# Altium PCB Main.PcbDoc (part 1 of 4)
Units mm, origin at the board's own origin, x right, y up, seen from the top; angles counter-clockwise.
Board outline 172.29 x 85.1 mm, 6 copper layers (Component Side, Ground Plane, Signal Layer 1, Signal Layer 2, Power Plane, Solder Side), stack 1.297 mm thick; 277 components, 256 nets, 1030 pads, 416 vias.
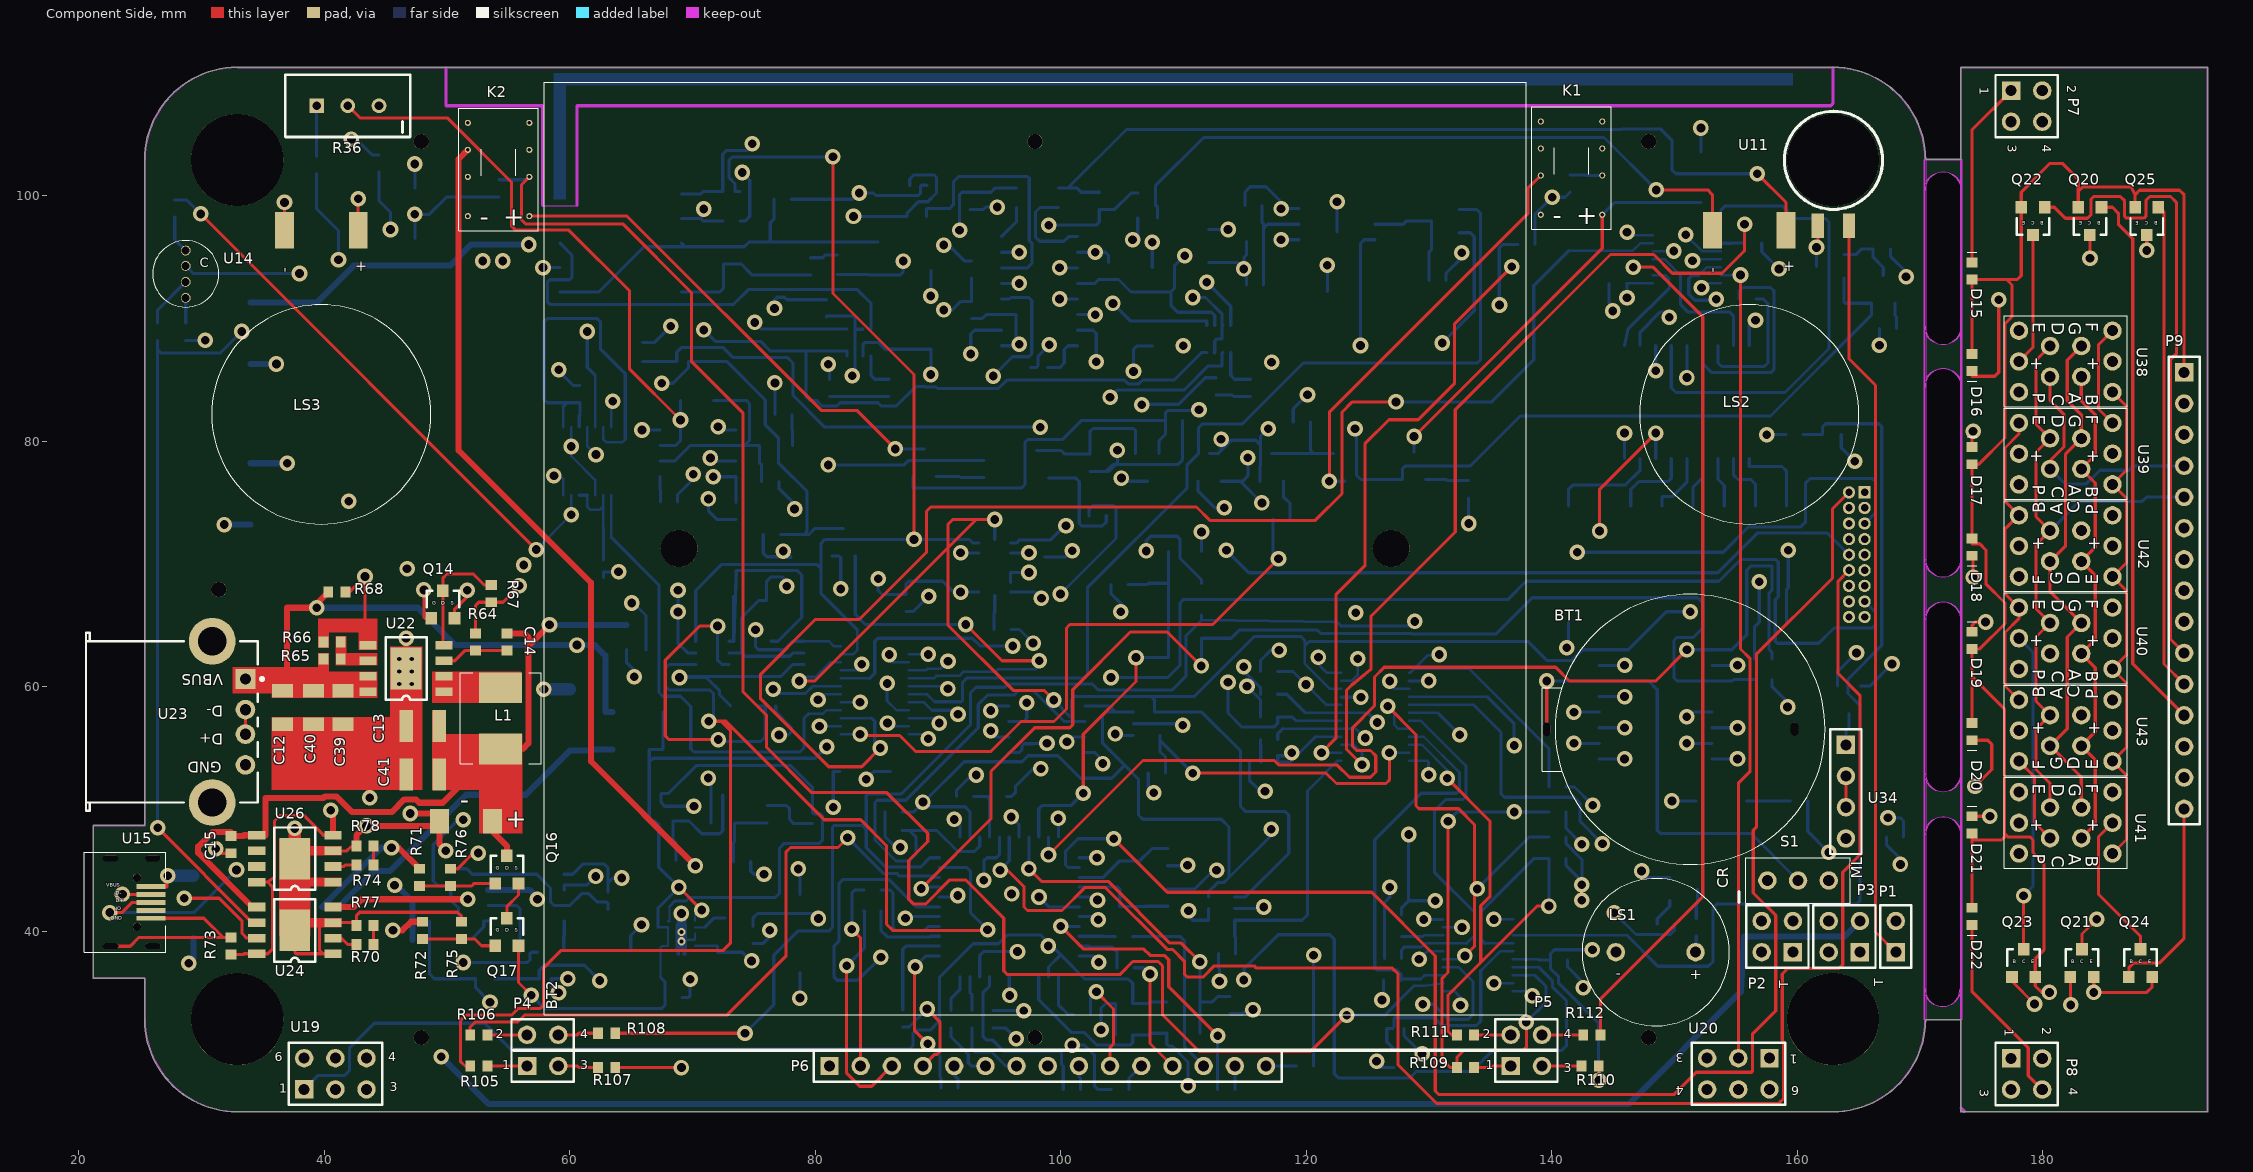
[diagram p0: Component Side view]
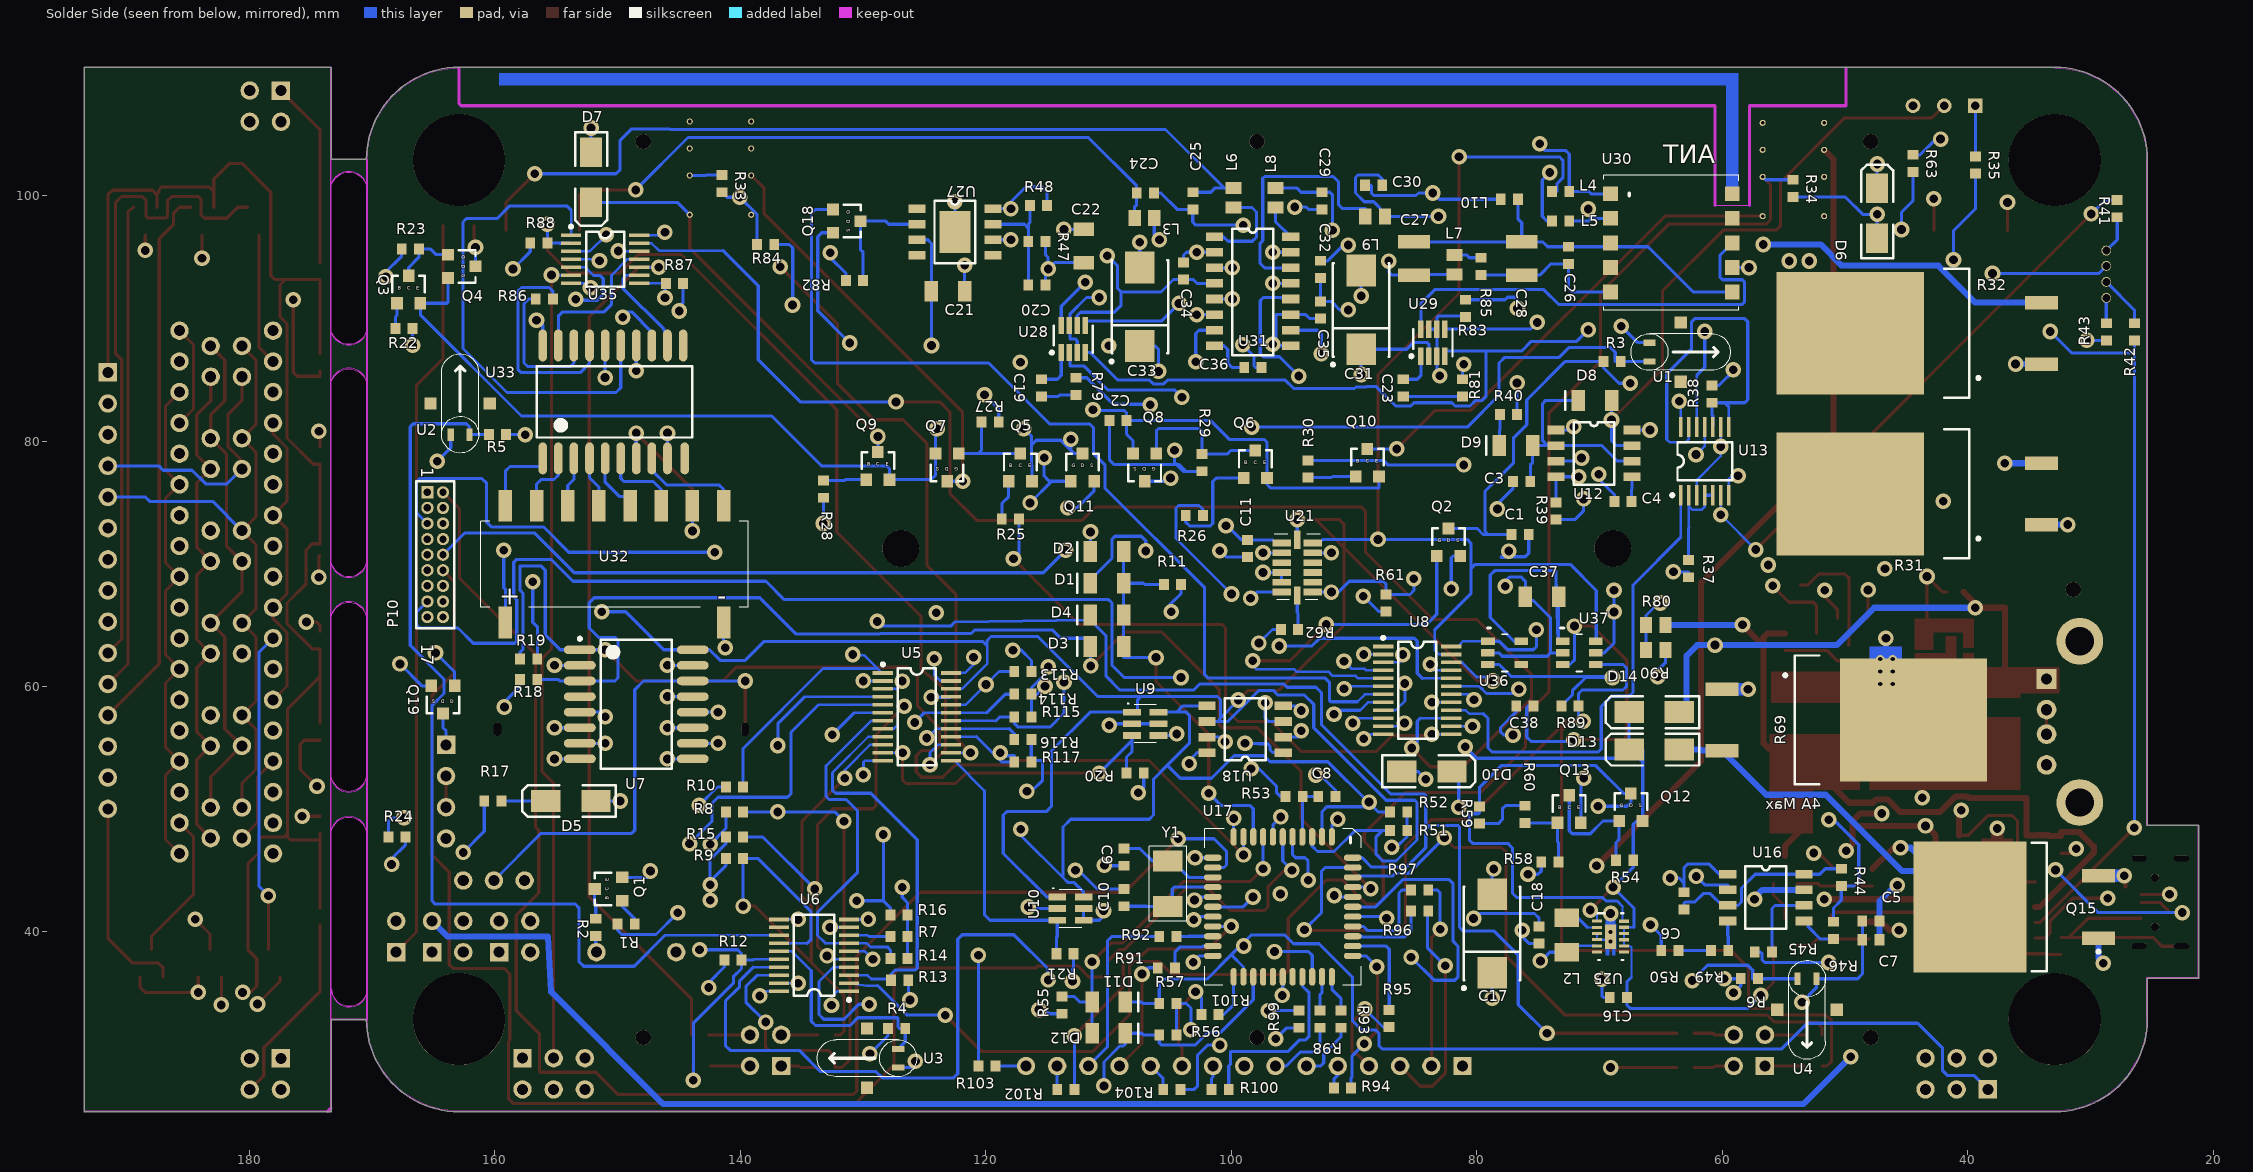
[diagram p1: Solder Side view, seen from below]
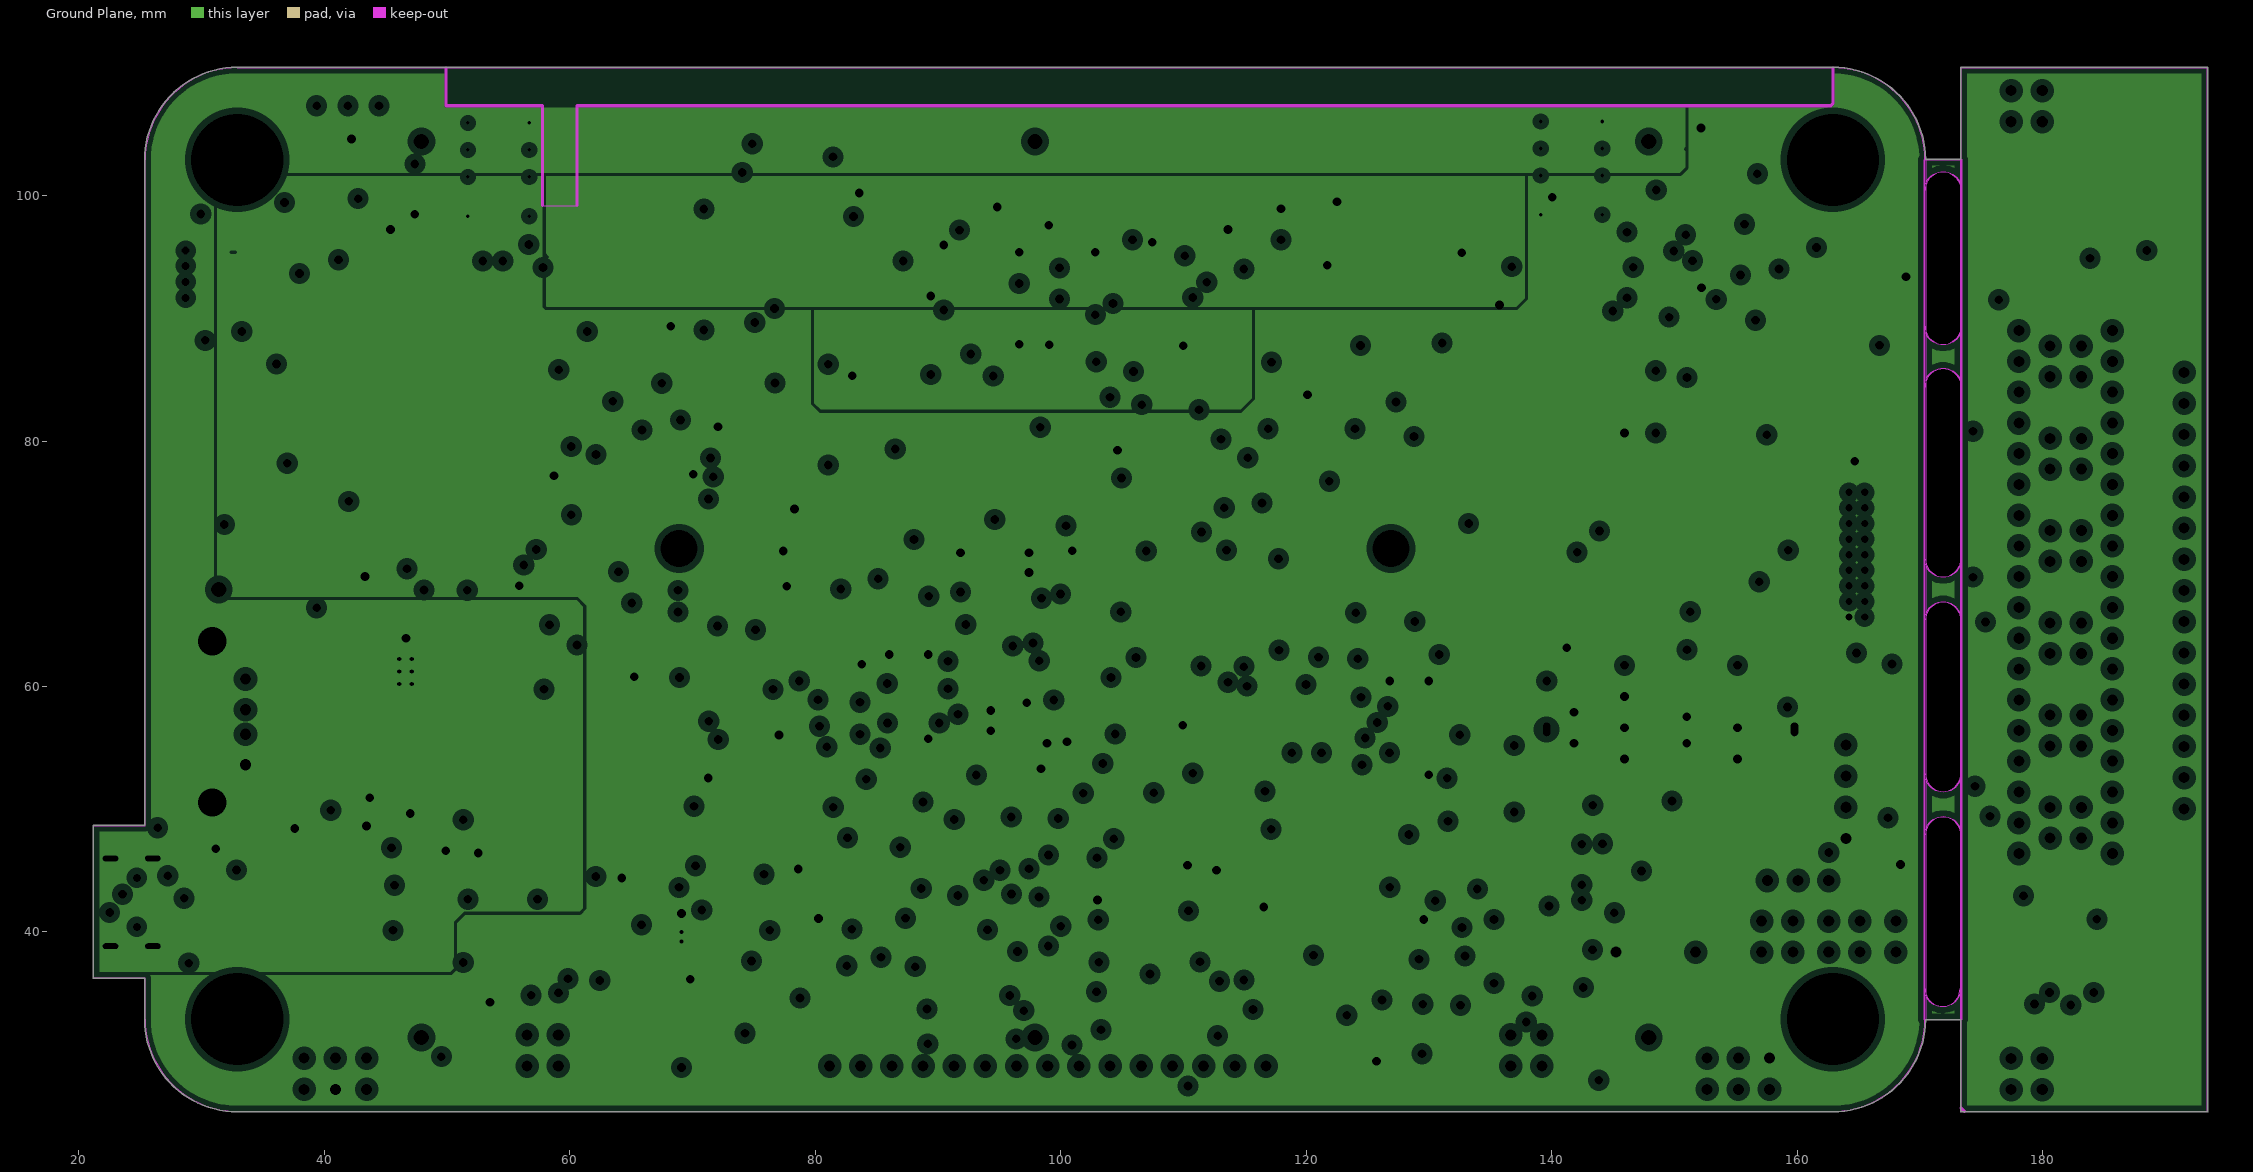
[diagram p2: Ground Plane, clearances drawn from the general rule]
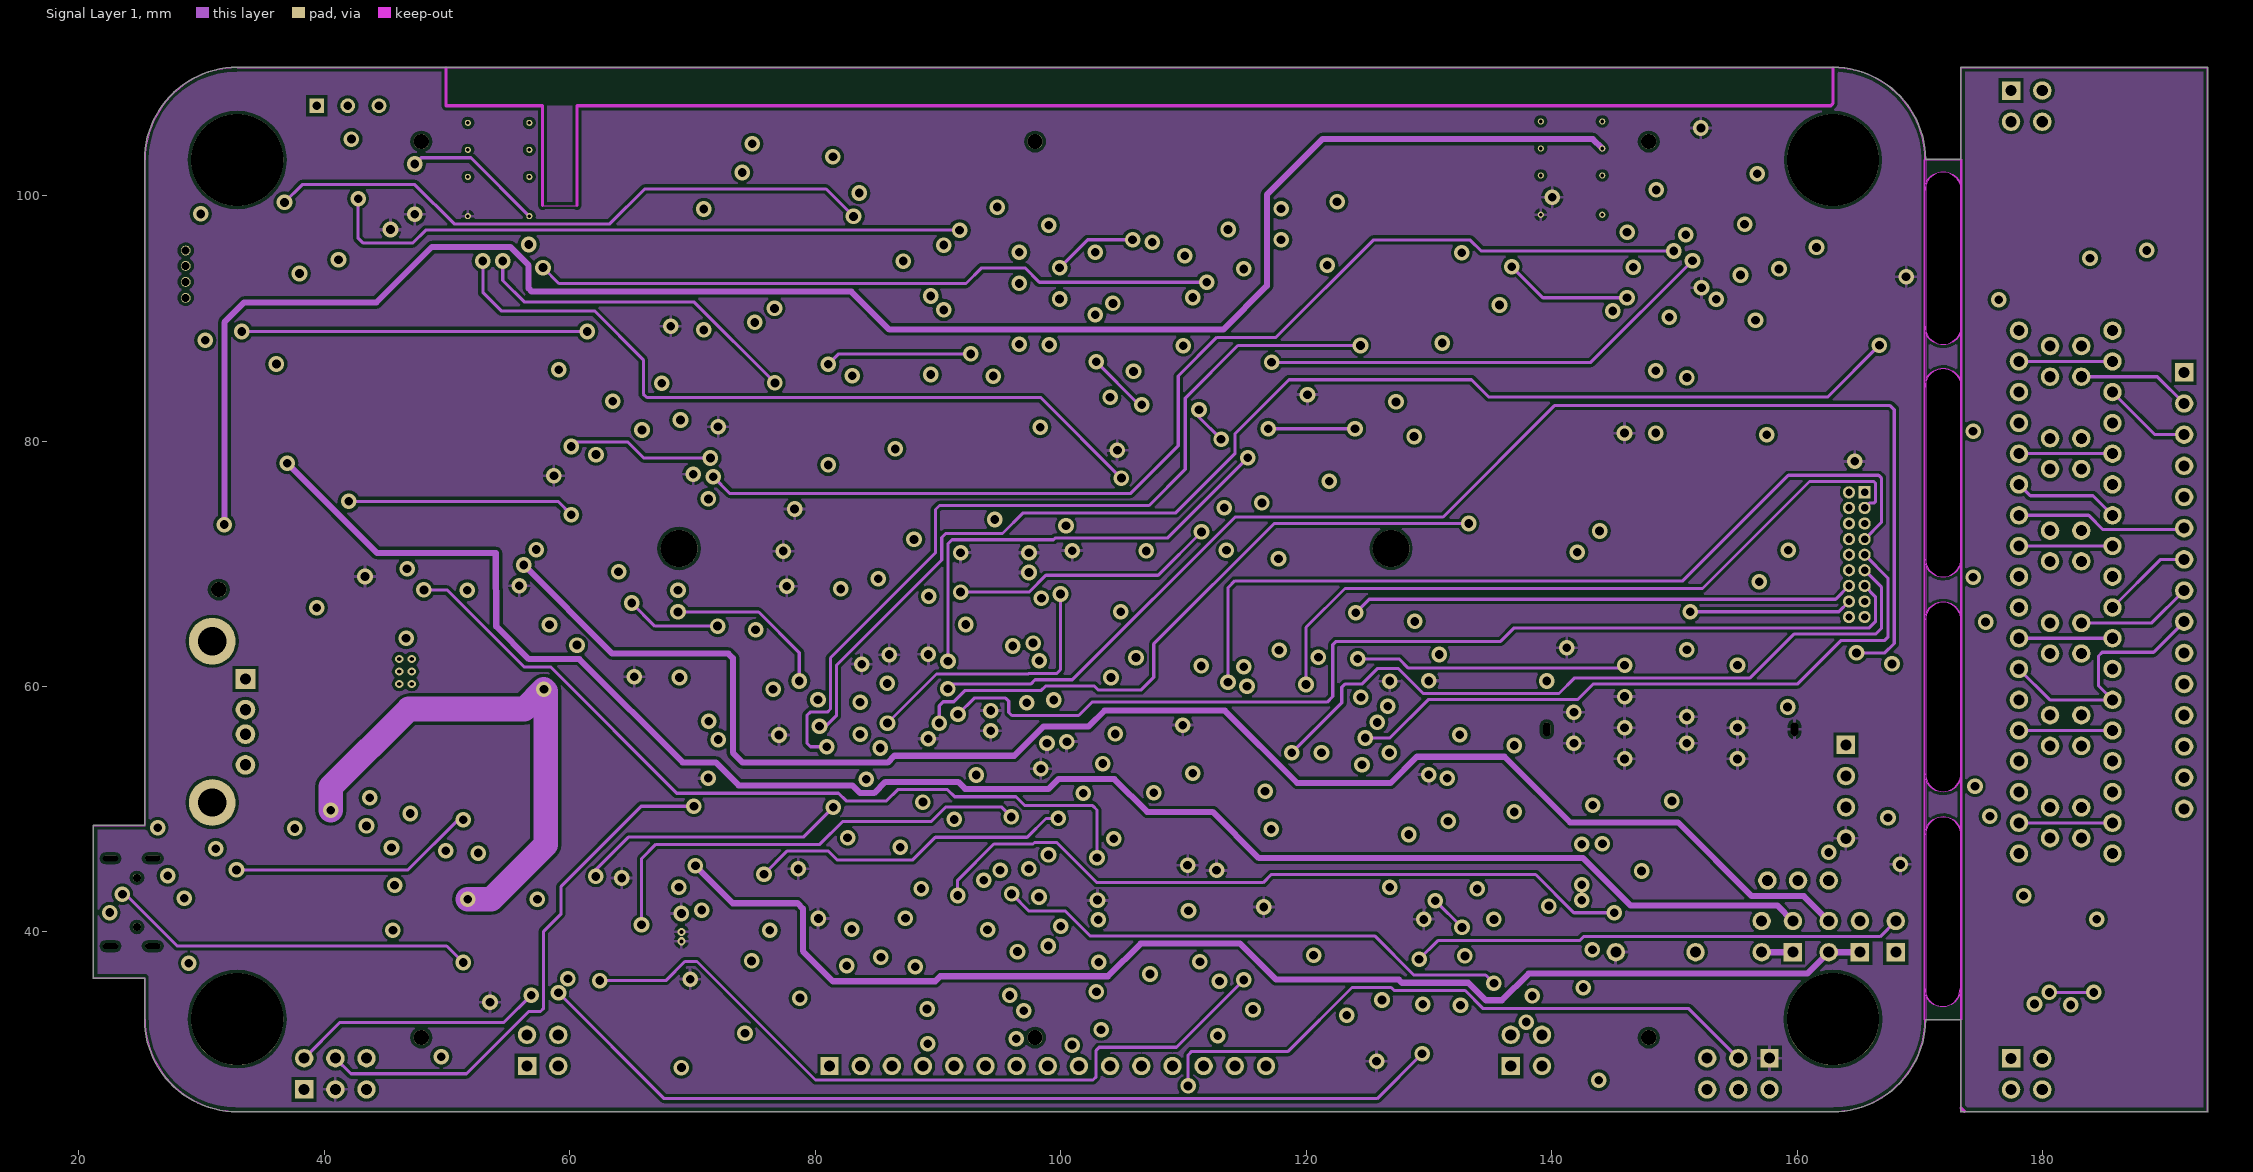
[diagram p3: Signal Layer 1]
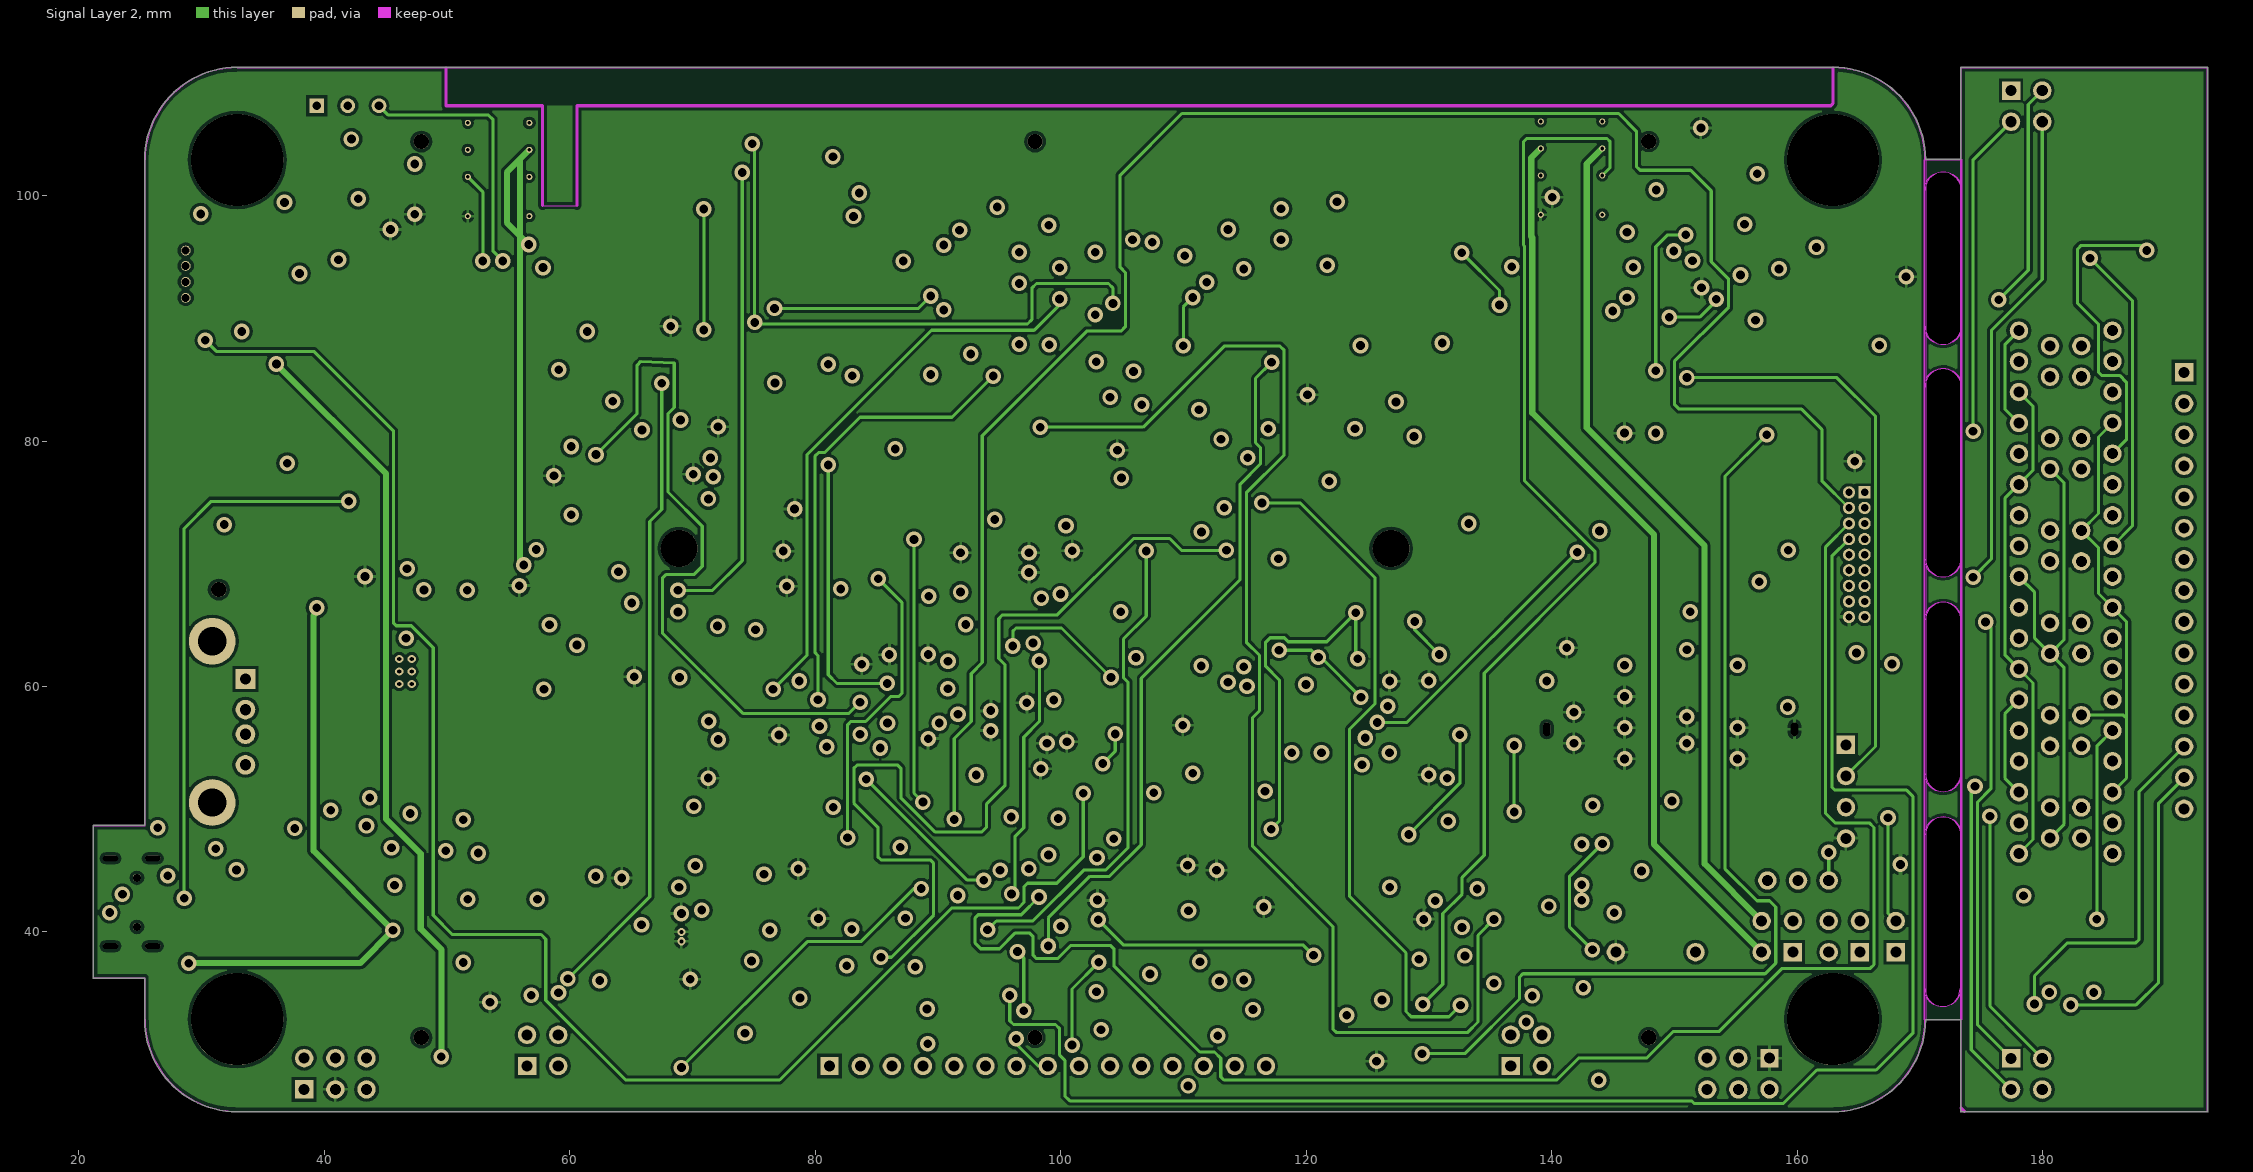
[diagram p4: Signal Layer 2]
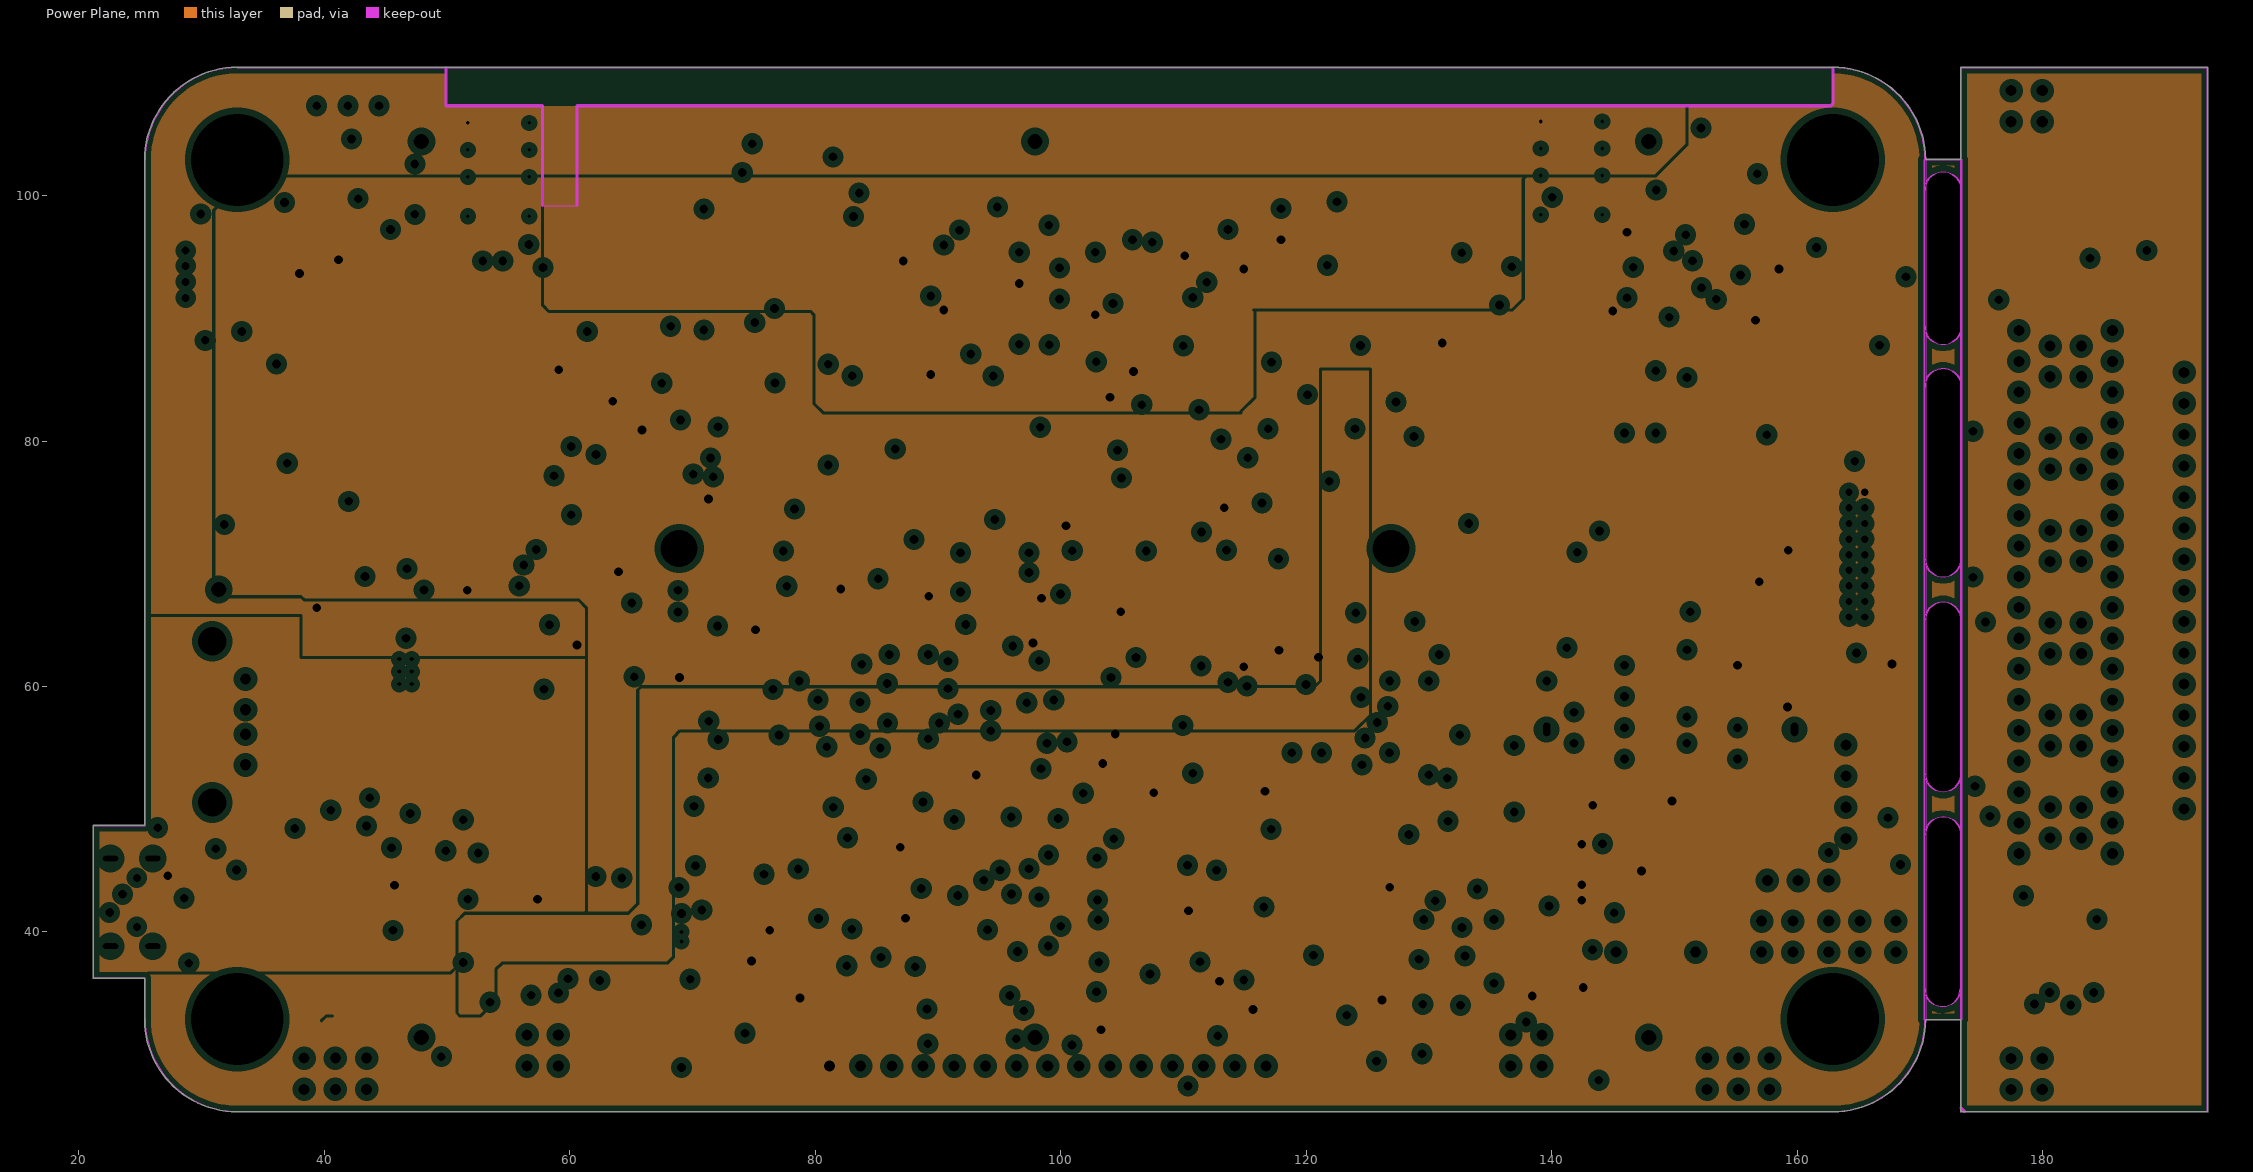
[diagram p5: Power Plane, clearances drawn from the general rule]

## Layer stack, top to bottom
Top Solder: solder mask 0.0102, Solder Resist, Dk 3.5
Component Side: signal copper 0.0356
Dielectric 1: core 0.32, FR-4, Dk 4.8
Ground Plane: plane copper 0.036, net (Multiple Nets)
Dielectric 3: prepreg 0.127, Dk 4.2
Signal Layer 1: signal copper 0.036
Dielectric 6: core 0.254, Dk 4.2
Signal Layer 2: signal copper 0.036
Dielectric 5: prepreg 0.127, Dk 4.2
Power Plane: plane copper 0.036, net (Multiple Nets)
Dielectric 4: core 0.254, Dk 4.2
Solder Side: signal copper 0.0356
Bottom Solder: solder mask 0.0102, Solder Resist, Dk 3.5

## Board outline
25.35,32.9 25.35,36.224 21.209,36.224 cw(c21.209,36.274) 21.159,36.274 21.159,48.641 cw(c21.209,48.641) 21.209,48.691 25.35,48.691 25.35,102.9 cw(c32.9,102.9) 32.9,110.45 162.9,110.45 cw(c162.9,102.9) 170.45,102.95 173.305,102.95 173.305,110.4 cw(c173.355,110.4) 173.355,110.45 193.4,110.45 cw(c193.4,110.4) 193.45,110.4 193.45,25.4 cw(c193.4,25.4) 193.4,25.35 173.355,25.35 cw(c173.355,25.4) 173.305,25.4 173.305,32.85 170.45,32.85 cw(c162.9,32.9) 162.9,25.35 32.9,25.35 cw(c32.9,32.9)
cut-out: 170.35,32.9 170.35,89.299 cw(c171.877,89.354) 170.349,89.354 cw(c170.399,89.354) 170.35,89.364 170.35,102.9 cw(c170.4,102.9) 170.45,102.9 170.45,100.968 cw(c171.877,100.422) 173.305,100.968 173.305,102.9 cw(c173.355,102.9) 173.405,102.9 173.405,32.9 cw(c173.355,32.9) 173.305,32.9 173.305,88.808 cw(c171.877,89.354) 170.45,88.806 170.45,32.9 cw(c170.4,32.9)
cut-out: 170.35,32.9 170.35,84.389 cw(c170.399,84.399) 170.349,84.399 cw(c171.877,84.399) 170.35,84.454 170.35,102.9 cw(c170.4,102.9) 170.45,102.9 170.45,84.947 cw(c171.877,84.399) 173.305,84.945 173.305,102.9 cw(c173.355,102.9) 173.405,102.9 173.405,32.9 cw(c173.355,32.9) 173.305,32.9 173.305,69.961 cw(c171.877,70.377) 170.45,69.958 170.45,32.9 cw(c170.4,32.9)
cut-out: 170.35,32.9 170.35,102.9 cw(c170.4,102.9) 170.45,102.9 170.45,65.844 cw(c171.877,65.423) 173.305,65.84 173.305,102.9 cw(c173.355,102.9) 173.405,102.9 173.405,32.9 cw(c173.355,32.9) 173.305,32.9 173.305,52.462 cw(c171.877,52.878) 170.45,52.459 170.45,32.9 cw(c170.4,32.9)
cut-out: 170.35,32.9 170.35,102.9 cw(c170.4,102.9) 170.45,102.9 170.45,48.342 cw(c171.877,47.923) 173.305,48.339 173.305,102.9 cw(c173.355,102.9) 173.405,102.9 173.405,32.9 cw(c173.355,32.9) 173.305,32.9 173.305,35.227 cw(c171.831,35.378) 170.45,34.841 170.45,32.9 cw(c170.4,32.9)

## Design rules (kind name [scope] priority, off if disabled: settings)
Clearance [Not InComponent('U25') vs Not InComponent('U25')] p1: gap=0.254 ignorepadtopadclearanceinfootprint=TRUE
Clearance Clearance_1 [InComponent('U25') vs InComponent('U25')] p2: gap=0.1 ignorepadtopadclearanceinfootprint=TRUE
HoleSize [All] p1: absolutevalues=TRUE maxlimit=10 minlimit=0.025 maxpercent=80.000 minpercent=20.000
MinimumSolderMaskSliver MinimumSolderMaskSliver_U25 [HasFootprint('DSS0012A') vs HasFootprint('DSS0012A')] p1: minsoldermaskwidth=0.04
MinimumSolderMaskSliver MinimumSolderMaskSliver_U36 [HasFootprint('DDC-5') vs HasFootprint('DDC-5')] p2: minsoldermaskwidth=0.04
MinimumSolderMaskSliver MinimumSolderMaskSliver_U37 [HasFootprint('DDC-6') vs HasFootprint('DDC-6')] p3: minsoldermaskwidth=0.14
MinimumSolderMaskSliver MinimumSolderMaskSliver_21 [HasFootprint('ALX') vs HasFootprint('ALX')] p4: minsoldermaskwidth=0.04
MinimumSolderMaskSliver MinimumSolderMaskSliver_U9 [HasFootprint('SOT23-6') vs HasFootprint('SOT23-6')] p5: minsoldermaskwidth=0.04
MinimumSolderMaskSliver MinimumSolderMaskSliver_U17 [HasFootprint('LQFP44') vs HasFootprint('LQFP44')] p6: minsoldermaskwidth=0.09
MinimumSolderMaskSliver MinimumSolderMaskSliver_U13 [HasFootprint('TSSOP14') vs HasFootprint('TSSOP14')] p7: minsoldermaskwidth=0.127
MinimumSolderMaskSliver MinimumSolderMaskSliver_U6 [HasFootprint('TSSOP20') vs HasFootprint('TSSOP20')] p8: minsoldermaskwidth=0.127
MinimumSolderMaskSliver MinimumSolderMaskSliver_U5 [HasFootprint('TSSOP24') vs HasFootprint('TSSOP24')] p9: minsoldermaskwidth=0.127
MinimumSolderMaskSliver MinimumSolderMaskSliver_U15 [HasFootprint('USB-Micro') vs HasFootprint('USB-Micro')] p10: minsoldermaskwidth=0.04
MinimumSolderMaskSliver MinimumSolderMaskSliver_U14 [HasFootprint('3COLOR-LED') vs HasFootprint('3COLOR-LED')] p11: minsoldermaskwidth=0.25
MinimumSolderMaskSliver MinimumSolderMaskSliver_U23 [HasFootprint('USB2.5-2H4C') vs HasFootprint('USB2.5-2H4C')] p12: minsoldermaskwidth=0.1
MinimumSolderMaskSliver MinimumSolderMaskSliver_P10 [HasFootprint('MHDR2X9') vs HasFootprint('MHDR2X9')] p13: minsoldermaskwidth=0.06
MinimumSolderMaskSliver [All] p14: minsoldermaskwidth=0.254
PlaneClearance [All] p1: clearance=0.508
PlaneConnect [All] p1: planeconnectstyle=Relief reliefexpansion=0.508 reliefentries=4 reliefconductorwidth=0.254 reliefairgap=0.254
PolygonConnect [All] p1: connectstyle=Relief reliefconductorwidth=0.254 reliefentries=4 polygonreliefangle="90 Angle" airgapwidth=0.254
RoutingVias [All] p1: holewidth=0.711 width=1.27 viastyle="Through Hole" minholewidth=0.33 minwidth=0.66 maxholewidth=0.711 maxwidth=1.27
SMDNeckDown [All] p1: percent=100.000
SolderMaskExpansion [All] p1: expansion=0.102
UnpouredPolygon [All] p1 off:
Width Width_HIgh_Load [InNetClass('High_Load')] p1: maxlimit=2 minlimit=0.254 preferedwidth=0.5
Width [All] p2: maxlimit=0.254 minlimit=0.12 preferedwidth=0.254
25 further rules are at their usual default settings.

## Classes and differential pairs
component class VERY_THIN: P10 U15 U25
component class U_Beeper: LS1 Q1 R1 R2
component class U_Control: D15 D16 D17 D18 D19 D20 D21 D22 P7 P8 P9 Q20 Q21 Q22 Q23 Q24 Q25 U38 U39 U40 U41 U42 U43
component class U_Extport: P10 R113 R114 R115 R116 R117
component class U_Fuse: C2 D6 D7 K1 K2 P1 P2 P3 Q3 Q4 Q5 Q6 Q7 Q8 Q9 Q10 Q11 R22 R23 R24 R25 R26 R27 R28 R29 R30 R31 R32 R33 R34 U11
component class U_Hg: C1 Q2 R3 R4 R5 R6 U1 U2 U3 U4
component class U_Indictor: C3 C4 D8 D9 R35 R36 R37 R38 R39 R40 R41 R42 R43 U12 U13 U14
component class U_Int_Hub: D1 D2 D3 D4 R7 R8 R9 R10 R11 R12 R13 R14 R15 R16 U5 U6
component class U_MCU: C5 C6 C7 C8 C9 C10 D10 D11 D12 P4 P5 P6 Q12 Q13 R44 R45 R46 R49 R50 R51 R52 R53 R54 R55 R56 R57 R58 R59 R60 R91 R92 R93 R94 R95 R96 R97 R98 R99 R100 R101 R102 R103 R104 R105 R106 R107 R108 R109 R110 R111 R112 U15 U16 U17 U18 U19 U20 Y1
component class U_MPU: C11 R61 R62 U21
component class U_Power_Adc: C37 C38 R80 R89 R90 U36 U37
component class U_Power: BT2 C12 C13 C14 C15 C16 C17 C18 C39 C40 C41 D13 D14 L1 L2 Q14 Q15 Q16 Q17 R63 R64 R65 R66 R67 R68 R69 R70 R71 R72 R73 R74 R75 R76 R77 R78 U22 U23 U24 U25 U26
component class U_Radio: C19 C20 C21 C22 C23 C24 C25 C26 C27 C28 C29 C30 C31 C32 C33 C34 C35 C36 L3 L4 L5 L6 L7 L8 L9 L10 LS2 LS3 Q18 R47 R48 R79 R81 R82 R83 R84 R85 U27 U28 U29 U30 U31
component class U_Remote: Q19 R86 R87 R88 U32 U33 U34 U35
component class U_RTC: BT1 D5 R17 R18 R19 S1 U7
component class U_Serial_Hub: U8
component class U_Thermo: R20 R21 U9 U10
net class High_Load: NetD13_1 NetK1_1 NetK1_4 NetK2_1 NetK2_4 NetP2_3 NetP3_3 NetR69_1 POWER_GND VCC_5V VCC_BAT VCC_USB
net class All_Other: A ANT B C C_A C_B C_C C_D C_DP C_E C_EXT_INT C_F C_FUSE0_LED C_FUSE1_LED C_G C_MPU_INT C_POWER_INT C_REMOTE C_RTC_INT C_S0 C_S1 C_S2 C_S3 C_S4 C_S5 C_TRIP_LED C_VCC_MCU D DP E EXT_INT F FUSE_POWER G GND HG_POWER INDICATOR_SW_OUT KEY_INT LIN LOUT MCU_POWER_EN MOD MPU_INT NetBT1_1 NetC3_2 NetC4_2 NetC6_1 NetC8_1 NetC9_2 NetC10_2 NetC14_2 NetC19_1 NetC19_2 NetC20_1 NetC23_1 NetC23_2 NetC24_2 NetC25_2 NetC26_1 NetC26_2 NetC29_2 NetC30_2 NetC36_2 NetC37_2 NetC38_2 NetD1_1 NetD5_2 NetD6_2 NetD7_2 NetD8_1 NetD9_2 NetD10_1 NetD10_2 NetK1_2 NetK1_5 NetK2_2 NetK2_5 NetL1_2 NetL2_1 NetL7_2 NetLS1_1 NetP1_1 NetP1_2 NetP4_1 NetP4_2 NetP4_3 NetP4_4 NetP5_1 NetP5_2 NetP5_3 NetP5_4 NetP6_2 NetP6_3 NetP6_4 NetP6_5 NetP6_6 NetP6_7 NetP6_8 NetP6_9 NetP6_10 NetP6_11 NetP6_12 NetP6_13 NetP6_14 NetP6_15 NetP10_4 NetP10_6 NetP10_8 NetP10_10 NetP10_12 NetP10_13 NetP10_15 NetQ1_1 NetQ1_2 NetQ2_2 NetQ3_1 NetQ3_2 NetQ4_1 NetQ5_1 NetQ5_2 NetQ6_1 NetQ6_2 NetQ9_2 NetQ10_2 NetQ11_2 NetQ12_2 NetQ13_2 NetQ14_1 NetQ14_2 NetQ16_2 NetQ16_3 NetQ17_2 NetQ18_1 NetQ18_2 NetQ19_1 NetQ19_2 NetQ20_1 NetQ21_1 NetQ22_1 NetQ23_1 NetQ24_1 NetQ25_1 NetR1_1 NetR3_1 NetR4_1 NetR5_1 NetR6_1 NetR7_1 NetR8_1 NetR9_1 NetR12_1 NetR13_2 NetR14_2 NetR15_2 NetR16_2 NetR17_1 NetR19_1 NetR20_1 NetR21_1 NetR22_1 NetR25_1 NetR26_1 NetR28_1 NetR30_1 NetR35_1 NetR36_2 NetR37_1 NetR38_1 NetR39_1 NetR41_1 NetR41_2 NetR42_1 NetR42_2 NetR43_1 NetR44_1 NetR45_1 NetR45_2 NetR46_2 NetR49_1 NetR49_2 NetR50_1 NetR59_1 NetR62_1 NetR65_1 NetR69_1 NetR70_1 NetR70_2 NetR74_1 NetR74_2 NetR86_1 NetR86_2 NetR87_1 NetR88_1 NetR112_1 NetU8_15 NetU8_16 NetU8_17 NetU8_18 NetU8_19 NetU23_2 NetU32_1 NetU32_2 NetU32_3 NetU32_4 NetU32_5 NetU32_6 NetU32_7 NetU32_8 NetU33_12 NetU33_13 NetU33_14 NetU33_15 NetU33_16 NetU33_19 OUTL+ OUTL- OUTR+ OUTR- PGND POWER_GND POWER_INT POWER_ON RIN ROUT RTC_INT S0 S1 S2 S3 S4 S5 SCL SCL_IN SDA SDA_IN SET SGND VCC_IN VCC_MCU VCC_RADIO

## Components (designator, comment, footprint, x,y, rotation, side; value= is the part's Value field where it differs from the comment)
BT1 "ML2032/CR2032" BAT2025-2032 151.266,56.515 r90 top
BT2 "Battery" 18650X4 97.9,71.247 r180 top
C1 "Cap Semi" 0603 76.454,72.39 r0 bottom value=1nF
C2 "Cap Semi" 0603 109.22,81.661 r180 bottom value=1nF
C3 "Cap Semi" 0603 76.327,76.708 r180 bottom value=3.3uF
C4 "Cap Semi" 0603 68.072,75.057 r180 bottom value=0.01uF
C5 "Cap Semi" 0603 47.879,40.894 r180 bottom value=0.1uF
C6 "Cap Semi" 0603 63.119,42.545 r90 bottom value=0.1uF
C7 "Cap Semi" 0603 47.879,39.37 r180 bottom value=10uF
C8 "Cap Semi" 0603 92.202,51.054 r180 bottom value=10uF
C9 "Cap Semi" 0603 108.712,46.101 r90 bottom value=47pF
C10 "Cap Semi" 0603 108.712,42.799 r270 bottom value=47pF
C11 "Cap Semi" 0603 98.679,71.247 r90 bottom value=10uF
C12 "Cap Semi" 1206 36.576,58.293 r90 top value=22uF
C13 "Cap Semi" 1210 48.006,56.769 r0 top value=47uF
C14 "Cap Semi" 0603 52.324,63.627 r270 top value=0.1uF
C15 "Cap Semi" 0603 32.385,47.117 r90 top value=10uF
C16 "Cap Semi" 0603 68.453,34.671 r180 bottom value=10uF
C17 "Cap Pol3" TC7343-2917 78.74,39.878 r90 bottom value=100uF
C18 "Cap Semi" 0603 74.93,39.751 r270 bottom value=10uF
C19 "Cap Semi" 0603 115.443,84.328 r90 bottom value=0.47uF
C20 "Cap Semi" 0603 115.824,92.71 r180 bottom value=0.47uF
C21 "Cap Semi" 1206 123.063,92.202 r0 bottom value=22uF
C22 "Cap Semi" 1206 112.014,95.885 r270 bottom value=22uF
C23 "Cap Semi" 0603 85.979,84.328 r90 bottom value=0.47uF
C24 "Cap Semi" 0603 106.996,100.203 r0 bottom value=220pF
C25 "Cap Semi" 0603 103.124,99.568 r90 bottom value=220pF
C26 "Cap Semi" 0603 72.517,95.123 r270 bottom value=1nF
C27 "Cap Semi" 1210 85.09,94.869 r270 bottom value=47uF
C28 "Cap Semi" 1210 76.327,94.869 r270 bottom value=47uF
C29 "Cap Semi" 0603 92.583,99.568 r90 bottom value=220pF
C30 "Cap Semi" 0603 88.392,100.838 r180 bottom value=220pF
C31 "Cap Pol3" TC7343-2917 89.408,90.678 r90 bottom value=470uF
C32 "Cap Semi" 0603 92.71,93.98 r90 bottom value=1uF
C33 "Cap Pol3" TC7343-2917 107.442,90.932 r90 bottom value=470uF
C34 "Cap Semi" 0603 103.886,93.853 r90 bottom value=1uF
C35 "Cap Semi" 0603 92.71,90.678 r270 bottom value=1uF
C36 "Cap Semi" 0603 98.233,85.979 r0 bottom value=1uF
C37 "Cap Semi" 1206 74.676,67.31 r180 bottom value=22uF
C38 "Cap Semi" 0603 76.073,58.42 r180 bottom value=0.1uF
C39 "Cap Semi" 1206 41.529,58.293 r90 top value=22uF
C40 "Cap Semi" 1206 39.116,58.293 r90 top value=22uF
C41 "Cap Semi" 1210 48.006,52.832 r0 top value=22uF
D1 "Diode 1N4148" 1206D 110.109,68.411 r0 bottom
D2 "Diode 1N4148" 1206D 110.109,70.993 r0 bottom
D3 "Diode 1N4148" 1206D 110.109,63.246 r0 bottom
D4 "Diode 1N4148" 1206D 110.109,65.828 r0 bottom
D5 "Diode SS14" SMA 153.797,50.673 r0 bottom
D6 "Diode SS14" SMA 47.371,98.552 r90 bottom
D7 "Diode SS14" SMA 152.146,101.491 r270 bottom
D8 "Diode 1N4148" 1206D 70.358,83.312 r0 bottom
D9 "Diode 1N4148" 1206D 76.788,79.629 r0 bottom
D10 "Diode SS14" SMA 84.056,53.086 r180 bottom
D11 "Diode 1N4148" 1206D 109.982,34.29 r180 bottom
D12 "Diode 1N4148" 1206D 109.982,31.75 r180 bottom
D13 "Diode SS34" SMA 65.532,54.864 r0 bottom
D14 "Diode SS34" SMA 65.532,57.912 r0 bottom
D15 "POWER" 0603D 174.244,93.853 r90 top
D16 "MPU" 0603D 174.244,86.402 r270 top
D17 "RTC" 0603D 174.244,78.811 r90 top
D18 "EXT" 0603D 174.244,71.36 r270 top
D19 "FUSE0" 0603D 174.244,63.768 r90 top
D20 "FUSE1" 0603D 174.244,56.317 r270 top
D21 "TRIP" 0603D 174.244,48.726 r90 top
D22 "REMOTE" 0603D 174.244,41.275 r270 top
K1 "Relay-DPDT" G6K2PY 141.605,102.235 r0 top
K2 "Relay-DPDT" G6K2PY 54.193,102.118 r0 top
L1 "Inductor" WNC0630 54.356,57.404 r180 top value=2.2uH
L2 "Inductor" 2520 72.644,39.751 r270 bottom value=4.7uH
L3 "Inductor" 0805 107.061,98.171 r0 bottom value="600R@100M 2A"
L4 "Inductor" 0603 73.152,100.33 r180 bottom value=10uH
L5 "Inductor" 0603 73.152,97.917 r180 bottom value=10uH
L6 "Inductor" 0805 99.822,99.822 r90 bottom value="600R@100M 2A"
L7 "Inductor" 0805 81.788,94.361 r90 bottom value="600R@100M 2A"
L8 "Inductor" 0805 96.393,99.822 r90 bottom value="600R@100M 2A"
L9 "Inductor" 0805 88.265,98.298 r180 bottom value="600R@100M 2A"
L10 "Inductor" 0603 77.343,99.695 r180 bottom value=10uH
LS1 "Bell" BEEPER 148.463,38.354 r180 top
LS2 "SPEAKER" SPEAKER 156.083,82.169 r90 top
LS3 "SPEAKER" SPEAKER 39.751,82.169 r90 top
P1 "Tripwire" HDR1X2 168.021,38.354 r90 top
P2 "Header 2X2" HDR2X2 159.639,38.354 r90 top
P3 "Header 2X2" HDR2X2 165.1,38.354 r90 top
P4 "Header 2X2" HDR2X2 56.515,29.083 r0 top
P5 "Header 2X2" HDR2X2 136.652,29.083 r0 top
P6 "Header 15" HDR1X15 81.153,29.083 r0 top
P7 "Header 2X2" HDR2X2 177.415,108.55 r270 top
P8 "Header 2X2" HDR2X2 177.415,29.7 r270 top
P9 "Header 15" HDR1X15 191.516,85.598 r270 top
P10 "MHDR2X9" MHDR2X9 165.481,75.819 r270 bottom
Q1 "MMBT3906" SOT23-3-PNP 150.731,43.5 r90 bottom
Q2 "AO3401" SOT23-3-PMOS 82.296,71.755 r180 bottom
Q3 "MMBT3906" SOT23-3-PNP 167.005,92.347 r180 bottom
Q4 "AO3401" SOT23-3-PMOS 162.687,94.234 r270 bottom
Q5 "MMBT3906" SOT23-3-PNP 117.18,77.851 r180 bottom
Q6 "MMBT3906" SOT23-3-PNP 98.034,78.105 r180 bottom
Q7 "AO3401" SOT23-3-PMOS 123.139,77.851 r0 bottom
Q8 "AO3401" SOT23-3-PMOS 107.041,77.851 r0 bottom
Q9 "MMBT3906" SOT23-3-PNP 128.778,77.978 r180 bottom
Q10 "MMBT3906" SOT23-3-PNP 88.9,78.232 r180 bottom
Q11 "AO3401" SOT23-3-PMOS 112.11,77.851 r180 bottom
Q12 "AO3401" SOT23-3-PMOS 67.437,50.165 r180 bottom
Q13 "MMBT3904" SOT23-3-NPN 72.456,50.02 r180 bottom
Q14 "AO3401" SOT23-3-PMOS 49.657,66.675 r0 top
Q15 "IRF4905S" D2PAK 36.195,42.037 r0 bottom
Q16 "AO3401" SOT23-3-PMOS 54.864,45.085 r0 top
Q17 "AO3401" SOT23-3-PMOS 54.864,40.005 r0 top
Q18 "AO3401" SOT23-3-PMOS 131.318,97.917 r270 bottom
Q19 "AO3401" SOT23-3-PMOS 164.211,58.928 r0 bottom
Q20 "MMBT3906" SOT23-3-PNP 183.832,97.917 r180 top
Q21 "MMBT3906" SOT23-3-PNP 183.197,37.465 r0 top
Q22 "MMBT3906" SOT23-3-PNP 179.197,97.917 r180 top
Q23 "MMBT3906" SOT23-3-PNP 178.435,37.465 r0 top
Q24 "MMBT3906" SOT23-3-PNP 187.96,37.465 r0 top
Q25 "MMBT3906" SOT23-3-PNP 188.468,97.917 r180 top
R1 "Res3" 0603 149.287,40.64 r180 bottom value=4.7K
R2 "Res3" 0603 151.765,40.386 r90 bottom value=20
R3 "Res3" 0603 68.961,86.487 r0 bottom value=330K
R4 "Res3" 0603 127.254,32.131 r0 bottom value=330K
R5 "Res3" 0603 159.766,80.518 r180 bottom value=330K
R6 "Res3" 0603 57.785,36.195 r0 bottom value=330K
R7 "Res3" 0603 127.062,39.624 r180 bottom value=100K
R8 "Res3" 0603 140.462,49.784 r0 bottom value=100K
R9 "Res3" 0603 140.462,45.974 r0 bottom value=100K
R10 "Res3" 0603 140.462,51.816 r0 bottom value=100K
R11 "Res3" 0603 104.775,68.326 r180 bottom value=6.8K
R12 "Res3" 0603 140.589,37.719 r0 bottom value=100K
R13 "Res3" 0603 127,36.068 r0 bottom value=100K
R14 "Res3" 0603 127.062,37.846 r0 bottom value=100K
R15 "Res3" 0603 140.462,47.752 r180 bottom value=100K
R16 "Res3" 0603 127.062,41.402 r0 bottom value=100K
R17 "Res3" 0603 160.147,50.673 r180 bottom value=680
R18 "Res3" 0603 157.226,60.579 r0 bottom value=100K
R19 "Res3" 0603 157.226,62.23 r180 bottom value=100K
R20 "Res3" 0603 107.823,52.959 r180 bottom value=330K
R21 "Res3" 0603 113.538,38.227 r180 bottom value=330K
R22 "Res3" 0603 167.386,89.154 r0 bottom value=1M
R23 "Res3" 0603 166.878,95.631 r180 bottom value=330K
R24 "Res3" 0603 167.956,47.752 r0 bottom value=330K
R25 "Res3" 0603 117.983,73.66 r0 bottom value=1M
R26 "Res3" 0603 102.997,73.914 r0 bottom value=1M
R27 "Res3" 0603 119.634,81.534 r0 bottom value=330K
R28 "Res3" 0603 133.223,76.073 r90 bottom value=4.7K
R29 "Res3" 0603 102.362,78.232 r90 bottom value=330K
R30 "Res3" 0603 93.726,77.724 r270 bottom value=4.7K
R31 "RES_POWER" RES_POWER 45.974,75.692 r0 bottom value=5
R32 "RES_POWER" RES_POWER 45.974,88.773 r0 bottom value=5
R33 "Res3" 0603 141.478,100.965 r90 bottom value=330K
R34 "Res3" 0603 54.229,100.584 r90 bottom value=330K
R35 "Res3" 0603 39.37,102.489 r270 bottom value=1K
R36 "RPot" VR5 41.91,107.315 r0 top value=1M
R37 "Res3" 0603 62.738,69.596 r270 bottom value=100K
R38 "Res3" 0603 60.833,83.82 r90 bottom value=100K
R39 "Res3" 0603 73.533,74.295 r270 bottom value=100K
R40 "Res3" 0603 77.408,82.169 r180 bottom value=1K
R41 "Res3" 0603 27.813,98.933 r90 bottom value=1K
R42 "Res3" 0603 26.416,88.9 r270 bottom value=1K
R43 "Res3" 0603 28.702,88.9 r270 bottom value=1K
R44 "Res3" 0603 50.292,44.45 r90 bottom value=1.5k
R45 "Res3" 0603 56.642,38.354 r180 bottom value=27
R46 "Res3" 0603 50.927,40.132 r270 bottom value=27
R47 "Res3" 0603 115.824,96.266 r180 bottom value=86K
R48 "Res3" 0603 115.697,99.187 r0 bottom value=27K
R49 "Res3" 0603 60.198,38.481 r180 bottom value=100
R50 "Res3" 0603 64.262,38.481 r180 bottom value=200
R51 "Res3" 0603 86.36,48.26 r180 bottom value=100K
R52 "Res3" 0603 86.36,49.784 r180 bottom value=100K
R53 "Res3" 0603 94.869,51.054 r180 bottom value=10K
R54 "Res3" 0603 67.945,45.847 r180 bottom value=330K
R55 "Res3" 0603 113.792,34.036 r270 bottom value=6.8K
R56 "Res3" 0603 105.156,31.623 r180 bottom value=6.8K
R57 "Res3" 0603 105.156,34.163 r0 bottom value=6.8K
R58 "Res3" 0603 74.041,45.72 r180 bottom value=100K
R59 "Res3" 0603 79.756,49.53 r90 bottom value=330K
R60 "Res3" 0603 76.073,49.592 r270 bottom value=33K
R61 "Res3" 0603 87.376,66.802 r270 bottom value=100K
R62 "Res3" 0603 95.25,64.643 r0 bottom value=10K
R63 "Res3" 0603 44.45,102.616 r90 bottom value=0
R64 "Res3" 0603 54.864,63.627 r90 top value=5.1
R65 "Res3" 0603 40.64,62.23 r180 top value=75K
R66 "Res3" 0603 40.64,63.627 r180 top value=24K
R67 "Res3" 0603 53.594,67.564 r90 top value=330K
R68 "Res3" 0603 41.021,67.691 r180 top value=330K
R69 "RES_POWER" RES_POWER 48.006,57.277 r180 bottom value=0.4
R70 "Res3" 0603 43.307,38.989 r0 top value=1K
R71 "Res3" 0603 47.752,44.45 r90 top value=1K
R72 "Res3" 0603 48.006,40.132 r90 top value=1K
R73 "Res3" 0603 32.385,38.862 r270 top value=330K
R74 "Res3" 0603 43.307,45.466 r0 top value=1K
R75 "Res3" 0603 51.181,40.132 r270 top value=330K
R76 "Res3" 0603 50.292,44.45 r270 top value=330K
R77 "Res3" 0603 43.307,40.513 r0 top value=200
R78 "Res3" 0603 43.307,46.99 r0 top value=200
R79 "Res3" 0603 112.649,84.455 r270 bottom value=10K
R80 "Res3" 0805 65.405,65.024 r180 bottom value=51K
R81 "Res3" 0603 81.153,84.328 r270 bottom value=10K
R82 "Res3" 0603 130.683,93.091 r180 bottom value=330K
R83 "Res3" 0603 80.899,90.805 r270 bottom value=0
R84 "Res3" 0603 137.922,96.012 r180 bottom value=0
R85 "Res3" 0603 79.629,94.234 r270 bottom value=10
R86 "Res3" 0603 155.956,91.567 r0 bottom value=680K
R87 "Res3" 0603 145.35,92.837 r180 bottom value=100K
R88 "Res3" 0603 156.402,96.139 r0 bottom value=100K
R89 "Res3" 0603 72.39,58.42 r0 bottom value=100K
R90 "Res3" 0805 65.405,62.992 r0 bottom value=51K
R91 "Res3" 0603 105.283,37.084 r0 bottom value=4.7K
R92 "Res3" 0603 105.156,39.624 r0 bottom value=4.7K
R93 "Res3" 0603 91.059,32.893 r90 bottom value=1K
R94 "Res3" 0603 90.932,27.305 r180 bottom value=1K
R95 "Res3" 0603 87.122,32.955 r90 bottom value=1K
R96 "Res3" 0603 84.644,41.698 r0 bottom value=1K
R97 "Res3" 0603 84.644,43.434 r0 bottom value=1K
R98 "Res3" 0603 92.774,32.893 r270 bottom value=1K
R99 "Res3" 0603 94.488,32.893 r270 bottom value=1K
R100 "Res3" 0603 100.9,27.178 r0 bottom value=1K
R101 "Res3" 0603 101.727,33.274 r0 bottom value=4.7K
R102 "Res3" 0603 113.473,27.178 r0 bottom value=4.7K
R103 "Res3" 0603 119.888,29.083 r180 bottom value=4.7K
R104 "Res3" 0603 104.837,27.178 r0 bottom value=4.7K
R105 "Res3" 0603 52.578,29.083 r180 top value=1K
R106 "Res3" 0603 52.578,31.623 r180 top value=1K
R107 "Res3" 0603 62.992,28.956 r180 top value=1K
R108 "Res3" 0603 62.992,31.75 r180 top value=1K
R109 "Res3" 0603 132.969,28.956 r180 top value=1K
R110 "Res3" 0603 143.129,29.083 r180 top value=1K
R111 "Res3" 0603 132.969,31.623 r0 top value=1K
R112 "Res3" 0603 143.256,31.623 r180 top value=1K
R113 "Res3" 0603 116.967,61.214 r180 bottom value=6.8K
R114 "Res3" 0603 116.967,59.372 r180 bottom value=6.8K
R115 "Res3" 0603 116.967,57.531 r180 bottom value=6.8K
R116 "Res3" 0603 116.967,55.689 r180 bottom value=6.8K
R117 "Res3" 0603 116.967,53.848 r180 bottom value=6.8K
S1 "SW-SPDT" SW-SPDT 160.06,44.196 r90 top
U1 "HGswitch" HG-H 65.913,87.249 r180 bottom
U2 "HGswitch" HG-H 162.814,80.518 r90 bottom
U3 "HGswitch" HG-H 127.127,29.718 r0 bottom
U4 "HGswitch" HG-H 53.086,36.195 r270 bottom
U5 "TCA9535" TSSOP24 125.603,57.531 r270 bottom
U6 "SN74HC244" TSSOP20 133.985,38.1 r90 bottom
U7 "DS3231" WSO16_M 148.463,58.547 r180 bottom
U8 "TCA9535" TSSOP24 84.836,59.69 r270 bottom
U9 "TMP101" SOT23-6 106.993,56.962 r270 bottom value=Value
U10 "TMP101" SOT23-6 113.089,41.91 r270 bottom value=Value
U11 "TRIP" TRIP 162.941,102.87 r90 top
U12 "ICM7555" SOP8 73.437,80.899 r180 bottom
U13 "74HC05" TSSOP14 61.341,78.359 r180 bottom
U14 "3ColorLED" 3COLOR-LED 28.702,93.614 r0 top
U15 "USB-Micro" USB-MICRO 23.749,42.418 r270 top
U16 "PL2303SA" SOP8 59.44,44.704 r180 bottom
U17 "STC89LE516RD+" LQFP44 91.796,47.752 r270 bottom
U18 "AT24C02" SOP8 95.858,54.61 r0 bottom
U19 "MOD" HDR2X3 38.354,27.178 r0 top
U20 "SET" HDR2X3 157.734,29.718 r180 top
U21 "ADXL345" ALX 94.615,69.723 r180 bottom
U22 "G5177C" SOP8-PAD 49.657,59.563 r180 top
U23 "USB-A" USB2.5-2H4C 20.581,57.116 r180 top
U24 "TP4056" SOP8-PAD 40.595,38.227 r180 top
U25 "TPS62745DSSR" DSS0012A 69.088,39.624 r180 bottom value=Value
U26 "TP4056" SOP8-PAD 40.595,44.069 r180 top
U27 "TJ4230" SOP8-PAD 125.503,98.933 r180 bottom
U28 "AD5245" SOT23-8 112.862,88.308 r180 bottom
U29 "AD5245" SOT23-8 83.566,88.011 r180 bottom
U30 "TEA5767" TEA5767 64.135,96.139 r180 bottom
U31 "PAM8403" SOP16 101.25,96.647 r180 bottom
U32 "8SWITCH" DSDT08LSGET 150.241,69.977 r180 bottom
U33 "SC2272M4" WSO20_M 150.368,83.185 r90 bottom
U34 "RADIO" RADIO 163.957,55.245 r270 top
U35 "74HC05" TSSOP14 151.003,94.742 r270 bottom
U36 "LP2980IM5X" DDC-5 77.724,62.738 r180 bottom
U37 "ADC121C021CIMK" DDC-6 71.628,62.738 r180 bottom
U38 "7SEG-CA" 8SEC-CA-28 181.864,86.487 r270 top
U39 "7SEG-CA" 8SEC-CA-28 181.864,78.969 r270 top
U40 "7SEG-CA" 8SEC-CA-28 181.864,63.932 r270 top
U41 "7SEG-CA" 8SEC-CA-28 181.864,48.895 r270 top
U42 "7SEG-CA" 8SEC-CA-28 181.864,71.45 r90 top
U43 "7SEG-CA" 8SEC-CA-28 181.864,56.413 r90 top
Y1 "XTAL" XTAL 105.156,43.942 r270 bottom

## Footprints (in the part's own frame and the unit in brackets; to place one, negate y for a bottom-side part, rotate by r counter-clockwise, add the part's x,y. Pads: shape width x height; smd on the part's side, far side on the other; paste and mask are expansions set on the pad)
3COLOR-LED [mm]
  round 0.8 hole 0.65: 1(0,1.905) 2(0,0.65) 3(0,-0.65) 4(0,-1.95)
  silkscreen extent -2.7,-2.7 2.7,2.7
8SEC-CA-28 [mm]
  round 1.5 hole 0.9: 1(-2.5,-3.81) 2(-1.25,-1.27) 3(0,-3.81) 4(1.25,-1.27) 5(2.5,-3.81) 6(2.5,3.81) 7(1.25,1.27) 8(0,3.81) 9(-1.25,1.27) 10(-2.5,3.81)
  silkscreen extent -3.7,-5 3.7,5
0603 [mm] "Chip Capacitor, Body 1.6x0.8mm, IPC High Density"
  rect 0.8x0.9 smd: 1(-0.7,0) 2(0.7,0)
  body extent -0.87,-0.48 0.87,0.48, height 1.3
0603D [mm] "Chip Capacitor, Body 1.6x0.8mm, IPC High Density"
  rect 0.8x0.9 smd: 1(-0.7,0) 2(0.7,0)
  silkscreen extent 1.52,-0.38 1.52,0.38, body extent -0.87,-0.48 0.87,0.48, height 1.3
0805 [mm] "Chip Resistor, Body 2.0x1.3mm, IPC High Density"
  rect 1x1.3 smd: 1(-0.8,0) 2(0.8,0)
  body extent -1.07,-0.7 1.07,0.7, height 0.65
1206 [mm] "Chip Resistor, Body 3.2x1.6mm, IPC High Density"
  rect 1.1x1.7 smd: 1(-1.35,0) 2(1.35,0)
  body extent -1.68,-0.87 1.68,0.87, height 0.71
1206D [mm] "Chip Resistor, Body 3.2x1.6mm, IPC High Density"
  rect 1.1x1.7 smd: 1(-1.35,0) 2(1.35,0)
  silkscreen extent 2.41,-0.76 2.41,0.76, body extent -1.68,-0.87 1.68,0.87, height 0.71
1210 [mm] "Chip Resistor, Body 3.2x2.5mm, IPC High Density"
  rect 1.1x2.6 smd: 1(-1.35,0) 2(1.35,0)
  body extent -1.68,-1.32 1.68,1.32, height 0.71
2520 [mm]
  rect 1.52x2 smd: 1(-1.4,0) 2(1.4,0)
18650X4 [mm]
  round 3 hole 3: 0(-29,0) 0(29,0)
  rect 1.524x2 smd: 1(44.196,22.225) 2(48.514,22.225)
  silkscreen extent -40,-38 40,38
ALX [mm]
  rect 1.5x0.55 smd: 1(-1.275,1.968) 2(-1.275,1.168) 3(-1.275,0.368) 4(-1.275,-0.432) 5(-1.275,-1.232) 6(-1.275,-2.032) 8(1.27,-2.032) 9(1.27,-1.232) 10(1.27,-0.432) 11(1.27,0.368) 12(1.27,1.168) 13(1.275,1.968)
  rect 0.55x1.5 smd: 7(0,-2.307) 14(0,2.243)
  silkscreen extent -1.85,-2.67 1.85,2.67
BAT2025-2032 [mm]
  oval 1.1x0.6 hole 0.6 slot 1.1 at 0 deg: 1(0,11.684) 2(0,-8.5)
  silkscreen extent -11,-11 11,12.07
BEEPER [mm]
  round 1.5 hole 0.9: 1(-3.25,0) 2(3.25,0)
  silkscreen extent -6,-6 6,6
D2PAK [mm] "D2-PAK, 4-Leads, Body 8.8x10.4mm, Pitch 2.54mm, Lead Span 15.1mm, IPC Low Density"
  rect 9.2x10.7 smd: 1(3.6,0)
  rect 2.7x1.1 smd: 2(-6.85,2.54) 3(-6.85,-2.54)
  silkscreen extent -6.97,-5.25 -1.4,5.25, body extent -2.65,-5.28 6.35,5.28, height 4.69
DDC-5 [mm]
  rect 1.1x0.6 smd: 1(-1.351,0.95) 2(-1.351,0) 3(-1.351,-0.95) 4(1.351,-0.95) 5(1.351,0.95)
  silkscreen extent -1.4,-1.52 0.23,2.03
DDC-6 [mm]
  rect 1.1x0.6 smd: 1(-1.351,0.95) 2(-1.351,0) 3(-1.351,-0.95) 4(1.351,-0.95) 5(1.351,0) 6(1.351,0.95)
  silkscreen extent -1.52,-1.52 0.23,2.03
DSDT08LSGET [mm]
  rect 1.1x2.6 smd: 1(8.89,4.75) 2(6.35,4.75) 3(3.81,4.75) 4(1.27,4.75) 5(-1.27,4.75) 6(-3.81,4.75) 7(-6.35,4.75) 8(-8.89,4.75) 9(-8.89,-4.75) 10(8.89,-4.75)
  silkscreen extent -10.9,-3.5 10.9,3.5
DSS0012A [mm]
  rect 0.8x0.25 smd paste+0 mask+0.051: 1(-1.1,1.27) 2(-1.1,0.75) 3(-1.1,0.25) 4(-1.1,-0.25) 5(-1.1,-0.75) 6(-1.1,-1.25) 7(1.1,-1.27) 8(1.1,-0.762) 9(1.1,-0.254) 10(1.1,0.254) 11(1.1,0.762) 12(1.1,1.25)
  rect 0.9x2 smd paste-0.45 mask+0.051: 13(0,0)
  Component Side region: -0.125,-1.5 -0.375,-1.5 -0.375,-1 -0.45,-1 -0.45,1 -0.375,1 -0.375,1.5 -0.125,1.5 -0.125,1 0.125,1 0.125,1.5 0.375,1.5 0.375,1 0.45,1 0.45,-1 0.375,-1 0.375,-1.5 0.125,-1.5 0.125,-1 -0.125,-1
  silkscreen extent -1.03,-1.91 1.04,1.91
G6K2PY [mm]
  round 0.5 hole 0.3: 1(-2.504,1.6) 2(-2.504,-0.6) 3(-2.504,3.8) 4(2.504,1.6) 5(2.504,-0.6) 6(2.504,3.8) 7(-2.504,-3.8) 8(2.504,-3.8)
  silkscreen extent -3.25,-5 3.25,5
HDR1X2 [mm] "Connector; Header; 2 Position"
  rect 1.5x1.5 hole 0.9: 1(0,0)
  round 1.5 hole 0.9: 2(2.54,0)
  silkscreen extent -1.27,-1.27 3.81,1.27
HDR1X15 [mm] "Connector; Header; 15 Position"
  rect 1.5x1.5 hole 0.9: 1(0,0)
  round 1.5 hole 0.9: 2(2.54,0) 3(5.08,0) 4(7.62,0) 5(10.16,0) 6(12.7,0) 7(15.24,0) 8(17.78,0) 9(20.32,0) 10(22.86,0) 11(25.4,0) 12(27.94,0) 13(30.48,0) 14(33.02,0) 15(35.56,0)
  silkscreen extent -1.27,-1.27 36.83,1.27
HDR2X2 [mm]
  rect 1.5x1.5 hole 0.9: 1(0,0)
  round 1.5 hole 0.9: 2(0,2.54) 3(2.54,0) 4(2.54,2.54)
  silkscreen extent -1.27,-1.27 3.81,3.81
HDR2X3 [mm]
  rect 1.5x1.5 hole 0.9: 1(0,0)
  round 1.5 hole 0.9: 2(2.54,0) 3(5.08,0) 4(5.08,2.54) 5(2.54,2.54) 6(0,2.54)
  silkscreen extent -1.27,-1.27 6.35,3.81
HG-H [mm]
  rect 1x1 smd: 0(2.54,-2.413) 0(2.54,2.413)
  rect 1x0.5 smd: 1(0,0.762) 2(0,-0.762)
  silkscreen extent -1.5,-1.5 6.58,1.5
LQFP44 [mm]
  oval 1.45x0.5 smd: 1(0,0) 2(0,-0.8) 3(0,-1.6) 4(0,-2.4) 5(0,-3.2) 6(0,-4) 7(0,-4.8) 8(0,-5.6) 9(0,-6.4) 10(0,-7.2) 11(0,-8) 23(11.4,-8) 24(11.4,-7.2) 25(11.4,-6.4) 26(11.4,-5.6) 27(11.4,-4.8) 28(11.4,-4) 29(11.4,-3.2) 30(11.4,-2.4) 31(11.4,-1.6) 32(11.4,-0.8) 33(11.4,0)
  oval 0.5x1.45 smd: 12(1.7,-9.7) 13(2.5,-9.7) 14(3.3,-9.7) 15(4.1,-9.7) 16(4.9,-9.7) 17(5.7,-9.7) 18(6.5,-9.7) 19(7.3,-9.7) 20(8.1,-9.7) 21(8.9,-9.7) 22(9.7,-9.7) 34(9.7,1.7) 35(8.9,1.7) 36(8.1,1.7) 37(7.3,1.7) 38(6.5,1.7) 39(5.7,1.7) 40(4.9,1.7) 41(4.1,1.7) 42(3.3,1.7) 43(2.5,1.7) 44(1.7,1.7)
  silkscreen extent -0.67,-10.37 12.08,2.37
MHDR2X9 [mm] "Connector; Header; 9x2 Position"
  rect 1x1 hole 0.6: 1(0,0)
  round 1 hole 0.6: 2(0,1.27) 3(1.27,0) 4(1.27,1.27) 5(2.54,0) 6(2.54,1.27) 7(3.81,0) 8(3.81,1.27) 9(5.08,0) 10(5.08,1.27) 11(6.35,0) 12(6.35,1.27) 13(7.62,0) 14(7.62,1.27) 15(8.89,0) 16(8.89,1.27) 17(10.16,0) 18(10.16,1.27)
  silkscreen extent -0.9,-0.9 11.06,2.17
RADIO [mm] "Connector; Header; 4 Position"
  rect 1.5x1.5 hole 0.9: 1(0,0)
  round 1.5 hole 0.9: 2(2.54,0) 3(5.08,0) 4(7.62,0)
  silkscreen extent -1.27,-1.27 8.89,1.27
RES_POWER [mm] "D2-PAK, 4-Leads, Body 8.8x10.4mm, Pitch 2.54mm, Lead Span 15.1mm, IPC Low Density"
  rect 2.7x1.1 smd: 1(-12,2.5) 2(-12,-2.5)
  rect 12x10 smd: 3(3.6,0)
  silkscreen extent -6.97,-5.25 -4.06,5.25, body extent -5.97,-5.08 3.05,5.08, height 4.69
SMA [mm] "DO-214-AC/SMA; 2 C-Bend Leads; Body 5 x 2.7 mm, inc. leads (LxW)"
  rect 2.4x1.8 smd: 1(-2.05,0) 2(2.05,0)
  silkscreen extent -3.65,-1.3 3.95,1.3
SOP8 [mm]
  rect 1.4x0.7 smd: 1(-0.1,0) 2(-0.1,-1.27) 3(-0.1,-2.54) 4(-0.1,-3.81) 5(6.1,-3.81) 6(6.1,-2.54) 7(6.1,-1.27) 8(6.1,0)
  silkscreen extent 1.33,-4.45 4.66,0.63
SOP8-PAD [mm]
  rect 1.4x0.7 smd: 1(-0.1,0) 2(-0.1,-1.27) 3(-0.1,-2.54) 4(-0.1,-3.81) 5(6.1,-3.81) 6(6.1,-2.54) 7(6.1,-1.27) 8(6.1,0)
  rect 2.5x3.4 smd: 9(3,-1.905)
  silkscreen extent 1.33,-4.44 4.67,0.64
SOP16 [mm]
  rect 1.4x0.7 smd: 1(-0.1,0) 2(-0.1,-1.27) 3(-0.1,-2.54) 4(-0.1,-3.81) 5(-0.1,-5.08) 6(-0.1,-6.35) 7(-0.1,-7.62) 8(-0.1,-8.89) 9(6.1,-8.89) 10(6.1,-7.62) 11(6.1,-6.35) 12(6.1,-5.08) 13(6.1,-3.81) 14(6.1,-2.54) 15(6.1,-1.27) 16(6.1,0)
  silkscreen extent 1.33,-9.65 4.66,0.63
SOT23-3-NPN [mm] "SOT-23; 3 Leads; Body 3.0 x 2.5 mm, inc. leads (LxW max)"
  rect 0.95x1 smd: 1(0.95,-1.125) 2(-0.95,-1.125) 3(0,1.125)
  silkscreen extent -1.33,-0.22 1.32,1.12
SOT23-3-PMOS [mm] "SOT-23; 3 Leads; Body 3.0 x 2.5 mm, inc. leads (LxW max)"
  rect 0.95x1 smd: 1(0,1.125) 2(-0.95,-1.125) 3(0.95,-1.125)
  silkscreen extent -1.33,-0.22 1.33,1.13
SOT23-3-PNP [mm] "SOT-23; 3 Leads; Body 3.0 x 2.5 mm, inc. leads (LxW max)"
  rect 0.95x1 smd: 1(0,1.125) 2(-0.95,-1.125) 3(0.95,-1.125)
  silkscreen extent -1.33,-0.22 1.33,1.12
SOT23-6 [mm] "SOT-457/SC-74; 6 Leads; Body 3 x 3 mm, inc. leads (LxW max)"
  rect 0.55x1.45 smd: 1(-0.95,-1.075) 2(0,-1.075) 3(0.95,-1.075) 4(0.95,1.075) 5(0,1.075) 6(-0.95,1.075)
  silkscreen extent -1.7,-1.45 1.55,0.9
SOT23-8 [mm] "SSOP; 8 Leads; Body Width 1.6 mm; Pitch 0.65 mm"
  rect 0.45x1.4 smd: 1(-0.975,-1.1) 2(-0.325,-1.1) 3(0.325,-1.1) 4(0.975,-1.1) 5(0.975,1.1) 6(0.325,1.1) 7(-0.325,1.1) 8(-0.975,1.1)
  silkscreen extent -1.88,-1.22 1.6,1.1
SPEAKER [mm]
  rect 3x1.524 smd: 1(15,-3) 2(15,3)
  silkscreen extent -8.93,-8.93 8.93,8.93
SW-SPDT [mm]
  round 1.5 hole 0.9: 1(0,2.5) 2(0,0) 3(0,-2.5)
  silkscreen extent -1.85,-4.25 1.85,4.83
TC7343-2917 [mm] "Capacitor, SM Tantalum; Body 7.3 x 4.3 mm (LxW typ)"
  rect 2.6x2.4 smd: 1(-3.2,0) 2(3.2,0)
  silkscreen extent -4.57,-2.3 3.8,2.43
TEA5767 [mm]
  rect 1.2x1.2 smd: 1(-4.953,4) 2(-4.953,2) 3(-4.953,0) 4(-4.953,-2) 5(-4.953,-4) 6(4.953,-4) 7(4.953,-2) 8(4.953,0) 9(4.953,2) 10(4.953,4)
  silkscreen extent -5.5,-5.5 5.5,5.5, body extent -5.46,-5.46 5.46,5.46, height 2
TRIP [mm]
  rect 2x1 smd: 1(-5.334,1.27) 2(-5.334,-1.27)
  silkscreen extent -4,-4 4,4
TSSOP14 [mm] "Shrink Small Outline; 16 Leads; Body Width 4.4 mm; Pitch 0.65 mm"
  rect 0.3x1.65 smd: 1(-2.021,-2.775) 2(-1.371,-2.775) 3(-0.721,-2.775) 4(-0.071,-2.775) 5(0.579,-2.775) 6(1.229,-2.775) 7(1.879,-2.775) 8(1.879,2.775) 9(1.229,2.775) 10(0.579,2.775) 11(-0.071,2.775) 12(-0.721,2.775) 13(-1.371,2.775) 14(-2.021,2.775)
  silkscreen extent -2.85,-2.9 2.16,1.55
TSSOP20 [mm] "Shrink Small Outline; 20 Leads; Body Width 4.4 mm; Pitch 0.65 mm"
  rect 0.3x1.6 smd: 1(-2.925,-2.85) 2(-2.275,-2.85) 3(-1.625,-2.85) 4(-0.975,-2.85) 5(-0.325,-2.85) 6(0.325,-2.85) 7(0.975,-2.85) 8(1.625,-2.85) 9(2.275,-2.85) 10(2.925,-2.85) 11(2.925,2.85) 12(2.275,2.85) 13(1.625,2.85) 14(0.975,2.85) 15(0.325,2.85) 16(-0.325,2.85) 17(-0.975,2.85) 18(-1.625,2.85) 19(-2.275,2.85) 20(-2.925,2.85)
  silkscreen extent -3.75,-2.97 3.3,1.65
TSSOP24 [mm] "Shrink Small Outline; 24 Leads; Body Width 4.4 mm; Pitch 0.65 mm"
  rect 0.3x1.65 smd: 1(-3.575,-2.775) 2(-2.925,-2.775) 3(-2.275,-2.775) 4(-1.625,-2.775) 5(-0.975,-2.775) 6(-0.325,-2.775) 7(0.325,-2.775) 8(0.975,-2.775) 9(1.625,-2.775) 10(2.275,-2.775) 11(2.925,-2.775) 12(3.575,-2.775) 13(3.575,2.775) 14(2.925,2.775) 15(2.275,2.775) 16(1.625,2.775) 17(0.975,2.775) 18(0.325,2.775) 19(-0.325,2.775) 20(-0.975,2.775) 21(-1.625,2.775) 22(-2.275,2.775) 23(-2.925,2.775) 24(-3.575,2.775)
  silkscreen extent -4.4,-2.9 3.95,1.55
USB2.5-2H4C [mm] "Connector; USB1.1, Type A, Thru-Hole; 4 Position; Right Angle"
  rect 1.6x1.6 hole 0.92: 1(-12.99,-3.5)
  round 1.6 hole 0.92: 2(-12.99,-1) 3(-12.99,1) 4(-12.99,3.5)
  round 3.8 hole 2.3: 5(-10.28,6.57) 6(-10.28,-6.57)
  silkscreen extent -14.47,-7.25 0,7.25, body extent -14,-7.25 0,7.25, height 7.01
USB-MICRO [mm]
  round 0.65 hole 0.65: 0(-2,0.975) 0(2,0.975)
  rect 0.4x2.4 smd: 1(-1.3,2.125) 2(-0.65,2.125) 3(0,2.125) 4(0.65,2.125) 5(1.3,2.125)
  oval 0.45x1.25 hole 0.45 slot 1.25 at 90 deg: 6(-3.575,2.275) 7(3.575,2.275) 8(-3.575,-1.175) 9(3.575,-1.175)
  silkscreen extent -4.06,-3.33 4.06,3.33
VR5 [mm] "Thru-Hole; 3 Leads"
  rect 1.2x1.2 hole 0.7: 1(-2.54,0)
  round 1.2 hole 0.7: 2(2.54,0) 3(0,0)
  silkscreen extent -5.08,-2.54 5.08,2.54
WNC0630 [mm]
  rect 3.5x2.5 smd: 1(0,2.5) 2(0,-2.5)
  silkscreen extent -3.3,-3.7 3.3,3.7
WSO16_M [mm] "16-Pin Small Outline Integrated Circuit 1.27 mm Pitch, IPC Low Density"
  oval 2.6x0.7 smd: 1(-4.6,4.445) 2(-4.6,3.175) 3(-4.6,1.905) 4(-4.6,0.635) 5(-4.6,-0.635) 6(-4.6,-1.905) 7(-4.6,-3.175) 8(-4.6,-4.445) 9(4.6,-4.445) 10(4.6,-3.175) 11(4.6,-1.905) 12(4.6,-0.635) 13(4.6,0.635) 14(4.6,1.905) 15(4.6,3.175) 16(4.6,4.445)
  silkscreen extent -4.72,-5.25 2.9,5.47, body extent -3.75,-5.25 3.75,5.25, height 2.65
WSO20_M [mm] "16-Pin Small Outline Integrated Circuit 1.27 mm Pitch, IPC Low Density"
  oval 2.6x0.7 smd: 1(-4.6,5.715) 2(-4.6,4.445) 3(-4.6,3.175) 4(-4.6,1.905) 5(-4.6,0.635) 6(-4.6,-0.635) 7(-4.6,-1.905) 8(-4.6,-3.175) 9(-4.6,-4.445) 10(-4.6,-5.842) 11(4.6,-5.715) 12(4.6,-4.445) 13(4.6,-3.175) 14(4.6,-1.905) 15(4.6,-0.635) 16(4.6,0.635) 17(4.6,1.905) 18(4.6,3.175) 19(4.6,4.445) 20(4.6,5.715)
  silkscreen extent -2.9,-6.48 2.9,6.22, body extent -3.75,-6.22 3.75,6.22, height 2.65
XTAL [mm]
  rect 1.7x2.4 smd: 1(-1.85,0) 2(1.85,0)
  silkscreen extent -3.05,-1.52 3.05,1.52

## Part data
BT1: library part Battery, "Multicell Battery", LatestRevisionDate=17-Jul-2002, LatestRevisionNote="Re-released for DXP Platform.", PackageDescription="Battery; 2 Leads", PackageReference=BAT-2, Published=24-Mar-1999, Publisher="Altium Limited"
BT2: "Multicell Battery", LatestRevisionDate=17-Jul-2002, LatestRevisionNote="Re-released for DXP Platform.", PackageDescription="Battery; 2 Leads", PackageReference=BAT-2, Published=24-Mar-1999, Publisher="Altium Limited"
C1 C2 C3 C4 C5 C6 C7 C8 C9 C10 C11 C12 C13 C14 C15 C16 C18 C19 C20 C21 C22 C23 C24 C25 C26 C27 C28 C29 C30 C32 C34 C35 C36 C37 C38 C39 C40 C41: "Capacitor (Semiconductor SIM Model)", LatestRevisionDate=29-May-2009, LatestRevisionNote="IPC-7351 Footprint Added.", PackageDescription="Chip Capacitor", PackageReference=C1206, Published=8-Jun-2000, Publisher="Altium Limited"
C17 C31 C33: "Polarized Capacitor (Surface Mount)", LatestRevisionDate=29-May-2009, LatestRevisionNote="IPC-7351 Footprint Added.", PackageDescription="Chip Capacitor", PackageReference=C0805, Published=8-Jun-2000, Publisher="Altium Limited"
D1 D2 D3 D4 D5 D6 D7 D8 D9 D10 D11 D12 D13 D14: library part "Diode 1N4005", "1 Amp General Purpose Rectifier", Code_JEDEC=DO-204-AL, ComponentLink1Description="Manufacturer Link", ComponentLink1URL=http://www.fairchildsemi.com/, ComponentLink2Description=Datasheet, ComponentLink2URL=http://www.fairchildsemi.com/ds/1N%2F1N4001.pdf, DatasheetVersion=1998, LatestRevisionDate=17-Jul-2002, LatestRevisionNote="Re-released for DXP Platform.", PackageDescription="Diode, Axial; Body 5.2 x 2.7 mm (LxDia. max), Lead Dia. 0.86 mm (max)", PackageReference=DO-41, PackageVersion=Aug-1999, Published=8-Jun-2000, Publisher="Altium Limited"
D15 D16 D17 D18 D19 D20 D21 D22: library part LED2, "Typical RED, GREEN, YELLOW, AMBER GaAs LED", LatestRevisionDate=17-Jul-2002, LatestRevisionNote="Re-released for DXP Platform.", PackageDescription="SM LED; 2 Flat Leads", PackageReference=3.2X1.6X1.1, PackageVersion=Feb-2002, Published=8-Jun-2000, Publisher="Altium Limited"
K1 K2: "Dual-Pole Dual-Throw Relay", LatestRevisionDate=17-Jul-2002, LatestRevisionNote="Re-released for DXP Platform.", PackageDescription="Relay; 8 Leads", PackageReference=DIP-P8, Published=24-Mar-1999, Publisher="Altium Limited"
LS1: "Electrical Bell", LatestRevisionDate=17-Jul-2002, LatestRevisionNote="Re-released for DXP Platform.", PackageReference=PIN2, Published=24-Mar-1999, Publisher="Altium Limited"
P1: library part "Header 2", "Header, 2-Pin", LatestRevisionDate=17-Jul-2002, LatestRevisionNote="Re-released for DXP Platform.", Publisher="Altium Limited"
P2 P3 P4 P5 P7 P8: "Header, 2-Pin, Dual row", LatestRevisionDate=17-Jul-2002, LatestRevisionNote="Re-released for DXP Platform.", Publisher="Altium Limited"
P6 P9: "Header, 15-Pin", LatestRevisionDate=17-Jul-2002, LatestRevisionNote="Re-released for DXP Platform.", Publisher="Altium Limited"
P10: "Header, 9-Pin, Dual row", LatestRevisionDate=17-Jul-2002, LatestRevisionNote="Re-released for DXP Platform.", Publisher="Altium Limited"
Q1 Q3 Q5 Q6 Q9 Q10 Q20 Q21 Q22 Q23 Q24 Q25: library part PNP, "PNP Bipolar Transistor", LatestRevisionDate=29-May-2009, LatestRevisionNote="IPC-7351 Footprint Added.", PackageDescription="3-Pin SOT-23 Package 0.95 mm Pitch, 2.4 mm Lead Span", PackageReference=SOT-23B, PackageVersion=Aug-1999, Published=8-Jun-2000, Publisher="Altium Limited"
Q2 Q4 Q7 Q8 Q11 Q12 Q14 Q15 Q16 Q17 Q18 Q19: library part MOSFET-P, "P-Channel MOSFET", LatestRevisionDate=17-Jul-2002, LatestRevisionNote="Re-released for DXP Platform.", PackageDescription="TO, Flat Index; 3 In-Line, Axial Leads; Body Dia. 4.6mm; Lead Dia. 0.5 mm (max)", PackageReference=E3, PackageVersion=1995/1996, Published=8-Jun-2000, Publisher="Altium Limited"
Q13: library part 2N3904, "NPN General Purpose Amplifier", ComponentLink1Description="Manufacturer Link", ComponentLink1URL=http://www.fairchildsemi.com/, ComponentLink2Description=Datasheet, ComponentLink2URL=http://www.fairchildsemi.com/ds/2N%2F2N3904.pdf, DatasheetVersion=1997, LatestRevisionDate=15-Jan-2003, LatestRevisionNote="PCB Footprint 'BCY-W3/D4.7' replaced", PackageDescription="TO, Flat Index; 3 In-Line, Axial Leads; Body Dia. 4.5mm; Leads 0.51 x 0.48 mm (max)", PackageReference=TO-92A, PackageVersion=Sep-1998, Published=8-Jun-2000, Publisher="Altium Limited"
R1 R2 R3 R4 R5 R6 R7 R8 R9 R10 R11 R12 R13 R14 R15 R16 R17 R18 R19 R20 R21 R22 R23 R24 R25 R26 R27 R28 R29 R30 R33 R34 R35 R37 R38 R39 R40 R41 R42 R43 R44 R45 R46 R47 R48 R49 R50 R51 R52 R53 R54 R55 R56 R57 R58 R59 R60 R61 R62 R63 R64 R65 R66 R67 R68 R70 R71 R72 R73 R74 R75 R76 R77 R78 R79 R80 R81 R82 R83 R84 R85 R86 R87 R88 R89 R90 R91 R92 R93 R94 R95 R96 R97 R98 R99 R100 R101 R102 R103 R104 R105 R106 R107 R108 R109 R110 R111 R112 R113 R114 R115 R116 R117: "Resistor", LatestRevisionDate=29-May-2009, LatestRevisionNote="IPC-7351 Footprint Added.", PackageDescription="Chip Resistor", PackageReference=J1-0603, Published=8-Jun-2000, Publisher="Altium Limited"
R36: "Potentiometer", LatestRevisionDate=17-Jul-2002, LatestRevisionNote="Re-released for DXP Platform.", PackageDescription="Variable Resistor, Thru-Hole; 3 Leads", PackageReference=VR5, Published=8-Jun-2000, Publisher="Altium Limited", Set Position=0.5, Sim Note="Enter the Resistance value and the set point into parameter fields."
S1: "SPDT Subminiature Toggle Switch, Right Angle Mounting, Vertical Actuation", ComponentLink1Description="Manufacturer Link", ComponentLink1URL=http://www.apem.com, DatasheetVersion=05-Dec-2000, LatestRevisionDate=17-Dec-2003, LatestRevisionNote="Schematic revised, PCB Footprint replaced.", PackageDescription="Switch; 4 Leads", PackageReference=TL36WW15050, Published=24-Mar-1999, Publisher="Altium Limited"
U9 U10: "Imported", Manufacturer="Texas Instruments", Manufacturer_Part_Number=tmp101_dbv_6, PACKAGE_DESIGNATOR=DBV, Datasheet URL=http://www.ti.com/lit/gpn/TMP101, FAMILY_NAME="TEMPERATURE SENSOR", GENERIC_PART_NUMBER=TMP101, INDUSTRY_STD_PKG_TYPE=SOT-23, PIN_COUNT=6, RefDes=RefDes, Type=DEV, Vendor="Texas Instruments"
U19 U20: library part BUTTON
U25: "Imported", Alternate PartNumber=TPS62745DSST, Manufacturer="Texas Instruments", CompType=IC, MountType=SMT, PackageReference=DSS0012A, PartNumber=TPS62745DSSR, PIN_COUNT=13, RefDes=RefDes, RoHS=Y, Type=DEV
Y1: "Crystal Oscillator", LatestRevisionDate=17-Jul-2002, LatestRevisionNote="Re-released for DXP Platform.", PackageDescription="Crystal, Thru-Hole; 2 Leads; Body 3.1 x 8.2 mm (Dia.xH)", PackageReference=R38, Published=8-Jun-2000, Publisher="Altium Limited"
L1 L2 L3 L4 L5 L6 L7 L8 L9 L10: Code_IEC=1005, Code_JEITA=0402, LatestRevisionDate=29-May-2009, LatestRevisionNote="IPC-7351 Footprint Added.", PackageDescription="Chip Inductor", PackageReference=0402-A, Published=8-Jun-2000, Publisher="Altium Limited"

## Free pads (board coordinates)
  round 1.25 hole 1.25: 0(31.4,67.9) 0(47.9,31.4) 0(47.9,104.4) 0(97.9,31.4) 0(97.9,104.4) 0(147.9,31.4) 0(147.9,104.4)
  round 7.5 hole 7.5: 0(32.9,32.9) 0(32.9,102.9) 0(162.9,32.9) 0(162.9,102.9)

## Via types
v1: diameter 1.27, hole 0.711, Component Side to Solder Side, tented both sides, 407 vias
v2: diameter 0.66, hole 0.33, Component Side to Solder Side, 8 vias
v3: diameter 1.27, hole 0.711, Component Side to Solder Side, 1 vias

## Nets (pads, with @x,y where several pads share a name; then routed paths per layer and width w, separated by ;. In a path a pad name is that pad's centre, name@x,y a point inside that pad or via, vN(x,y) a via of type N, cw(c..) or ccw(c..) an arc to the next point about the centre after c; other vN are vias at no path point)
A: R97.2 U17.37 | length 7.9
  Solder Side w0.254: R97.2@85.344,43.434 86.069,43.434 86.323,43.18 86.323,40.386 86.6,40.109 88.863,40.109 89.206,40.452 U17.37@90.096,40.452
ANT: U30.10
B: R96.2 U17.36 | length 6.6
  Solder Side w0.254: R96.2@85.344,41.698 85.344,40.107 85.85,39.601 89.32,39.601 89.371,39.652 U17.36@90.096,39.652
C: R95.2 U17.35 | length 8
  Solder Side w0.254: R95.2@87.122,33.655 87.122,38.598 87.376,38.852 U17.35@90.096,38.852
C_A: P9.2 U38.7 U39.7 U40.7 U41.7 U42.2 U43.2 | length 51.6
  Component Side w0.254: U41.7@183.134,47.645 184.277,48.788 184.277,54.02 U43.2@183.134,55.163 184.277,56.306 184.277,61.539 U40.7@183.134,62.682 184.277,63.825 184.277,69.057 U42.2@183.134,70.2 184.277,71.343 184.277,76.576 U39.7@183.134,77.719 184.277,78.862 184.277,82.144 183.134,83.287 U38.7@183.134,85.237
  Signal Layer 1 w0.254: U38.7@183.134,85.237 189.337,85.237 P9.2@191.516,83.058
C_B: P9.3 U38.6 U39.6 U40.6 U41.6 U42.1 U43.1 | length 49.6
  Component Side w0.254: U41.6@185.674,46.395 186.817,47.538 186.817,52.77 U43.1@185.674,53.913 186.817,55.056 186.817,60.289 U40.6@185.674,61.432 186.817,62.575 186.817,67.807 U42.1@185.674,68.95 186.817,70.093 186.817,75.326 U39.6@185.674,76.469 186.817,77.612 186.817,82.844 U38.6@185.674,83.987
  Signal Layer 1 w0.254: U38.6@185.674,83.987 189.143,80.518 P9.3@191.516,80.518
C_C: P9.4 U38.4 U39.4 U40.4 U41.4 U42.10 U43.10 | length 67.1
  Component Side w0.254: U43.10@178.054,53.913 179.324,52.643 179.324,48.915 U41.4@180.594,47.645 ; U39.4@180.594,77.719 180.594,78.41 181.737,79.553 181.737,82.144 180.594,83.287 U38.4@180.594,85.237
  Signal Layer 2 w0.254: U42.10@178.054,68.95 179.335,67.669 179.335,63.941 U40.4@180.594,62.682 ; U41.4@180.594,47.645 181.737,48.788 181.737,61.539 U40.4@180.594,62.682 ; U39.4@180.594,77.719 181.737,76.576 181.737,63.825 U40.4@180.594,62.682
  Solder Side w0.254: U39.4@180.594,77.719 181.808,76.505 183.54,76.505 184.658,77.622 187.02,77.622 187.376,77.978 P9.4@191.516,77.978
C_D: P9.5 U38.2 U39.2 U40.2 U41.2 U42.7 U43.7 | length 54.4
  Component Side w0.254: U41.2@180.594,50.145 180.594,52.095 179.451,53.238 179.451,56.52 U43.7@180.594,57.663 179.451,58.806 179.451,64.039 U40.2@180.594,65.182 179.451,66.325 179.451,71.557 U42.7@180.594,72.7 179.451,73.843 179.451,79.076 U39.2@180.594,80.219 179.451,81.362 179.451,86.594 U38.2@180.594,87.737
  Solder Side w0.254: U42.7@180.594,72.7 182.976,75.082 188.112,75.082 188.468,75.438 P9.5@191.516,75.438
C_DP: P9.9 U38.5 U39.5 U40.5 U41.5 U42.5 U43.5 | length 69.9
  Signal Layer 1 w0.254: U40.5@178.054,61.432 180.572,58.913 U43.5@185.674,58.913 184.531,60.056 184.531,62.484 184.836,62.789 189.027,62.789 P9.9@191.516,65.278 ; U39.5@178.054,76.469 178.983,75.54 184.085,75.54 U42.5@185.674,73.95
  Signal Layer 2 w0.254: U41.5@178.054,46.395 179.197,47.538 179.197,60.289 U40.5@178.054,61.432 176.911,62.575 176.911,75.326 U39.5@178.054,76.469 179.197,77.612 179.197,82.844 U38.5@178.054,83.987
C_E: P9.6 U38.1 U39.1 U40.1 U41.1 U42.6 U43.6 | length 56.3
  Component Side w0.254: U43.6@178.054,58.913 176.923,60.044 176.923,64.4 178.054,65.531 U40.1@178.054,66.432 176.911,67.575 176.911,72.807 U42.6@178.054,73.95 176.923,75.081 176.923,79.437 178.054,80.568 U39.1@178.054,81.469
  Signal Layer 1 w0.254: U42.6@178.054,73.95 183.733,73.95 184.887,72.796 191.516,72.796 P9.6@191.516,72.898
  Signal Layer 2 w0.254: U41.1@178.054,51.395 176.911,52.538 176.911,57.77 U43.6@178.054,58.913 ; U39.1@178.054,81.469 176.911,82.612 176.911,87.844 U38.1@178.054,88.987